# Altium PCB SmartCantonDevBox.PcbDoc (part 1 of 2)
Units mm, origin at the board's own origin, x right, y up, seen from the top; angles counter-clockwise.
Board outline 68 x 80 mm, 4 copper layers (Component Side, Ground Plane, Power Plane, Solder Side), stack 1.569 mm thick; 161 components, 90 nets, 543 pads, 213 vias.
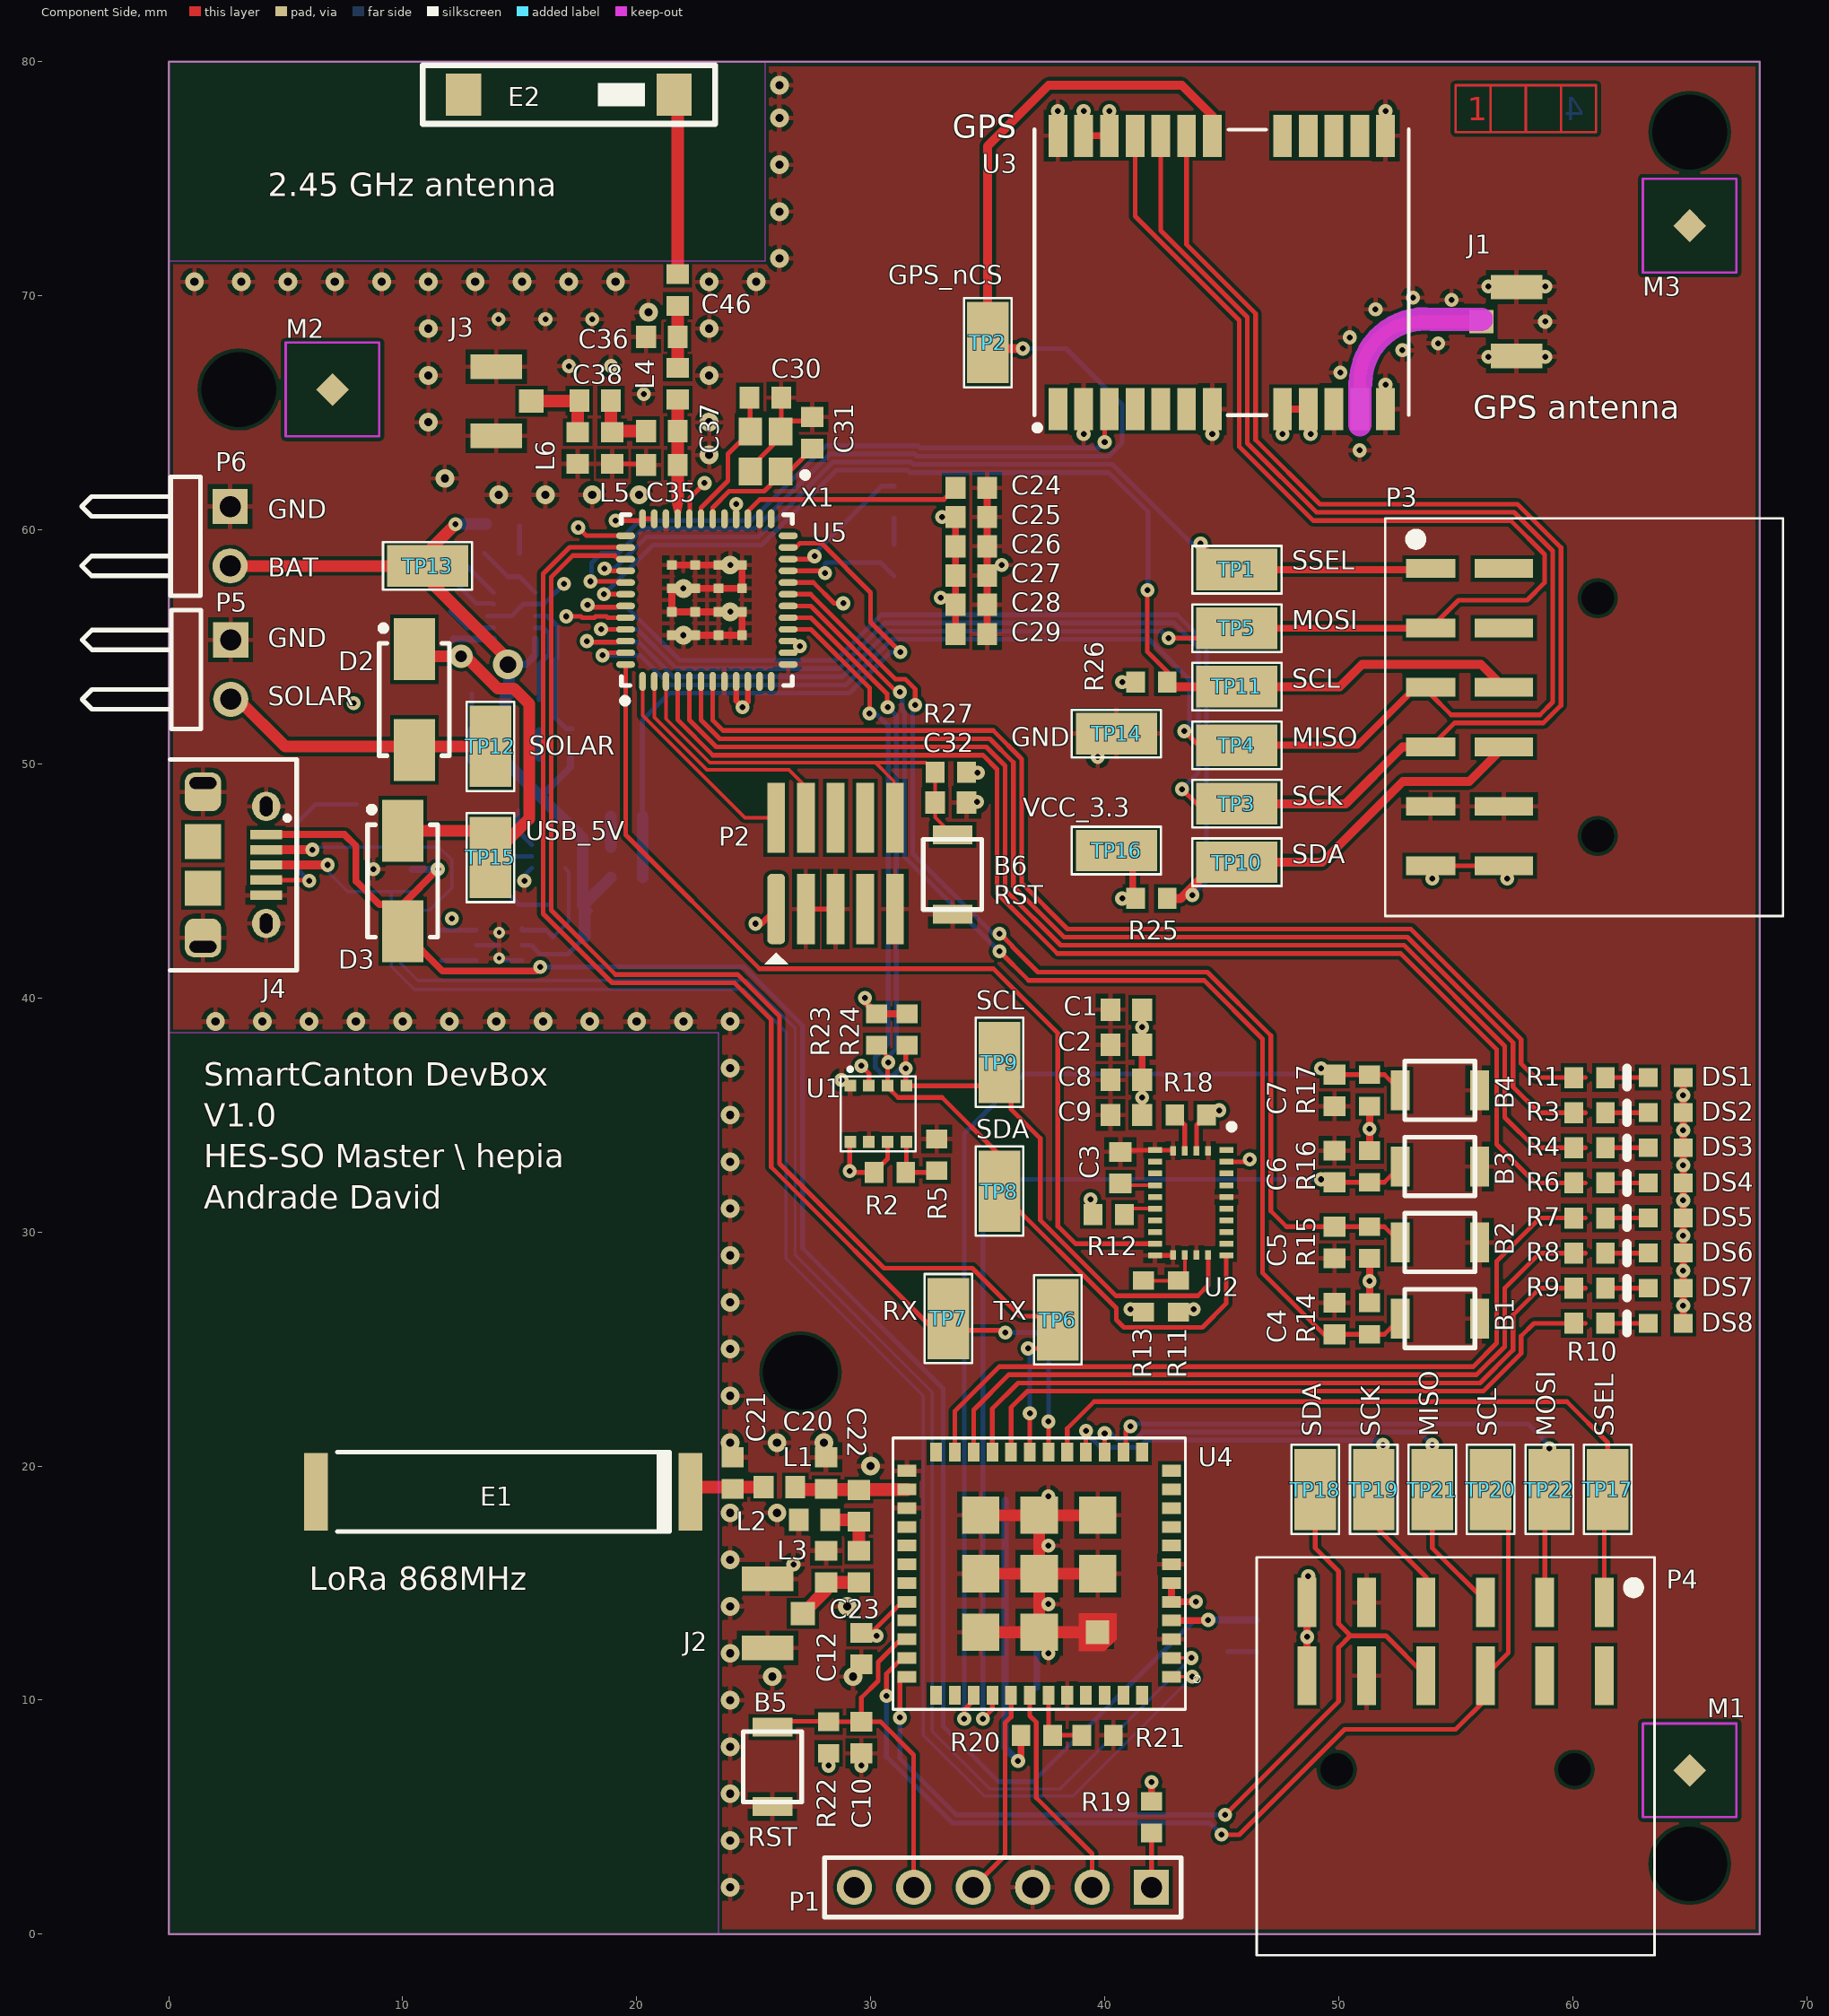
[diagram p0: Component Side view]
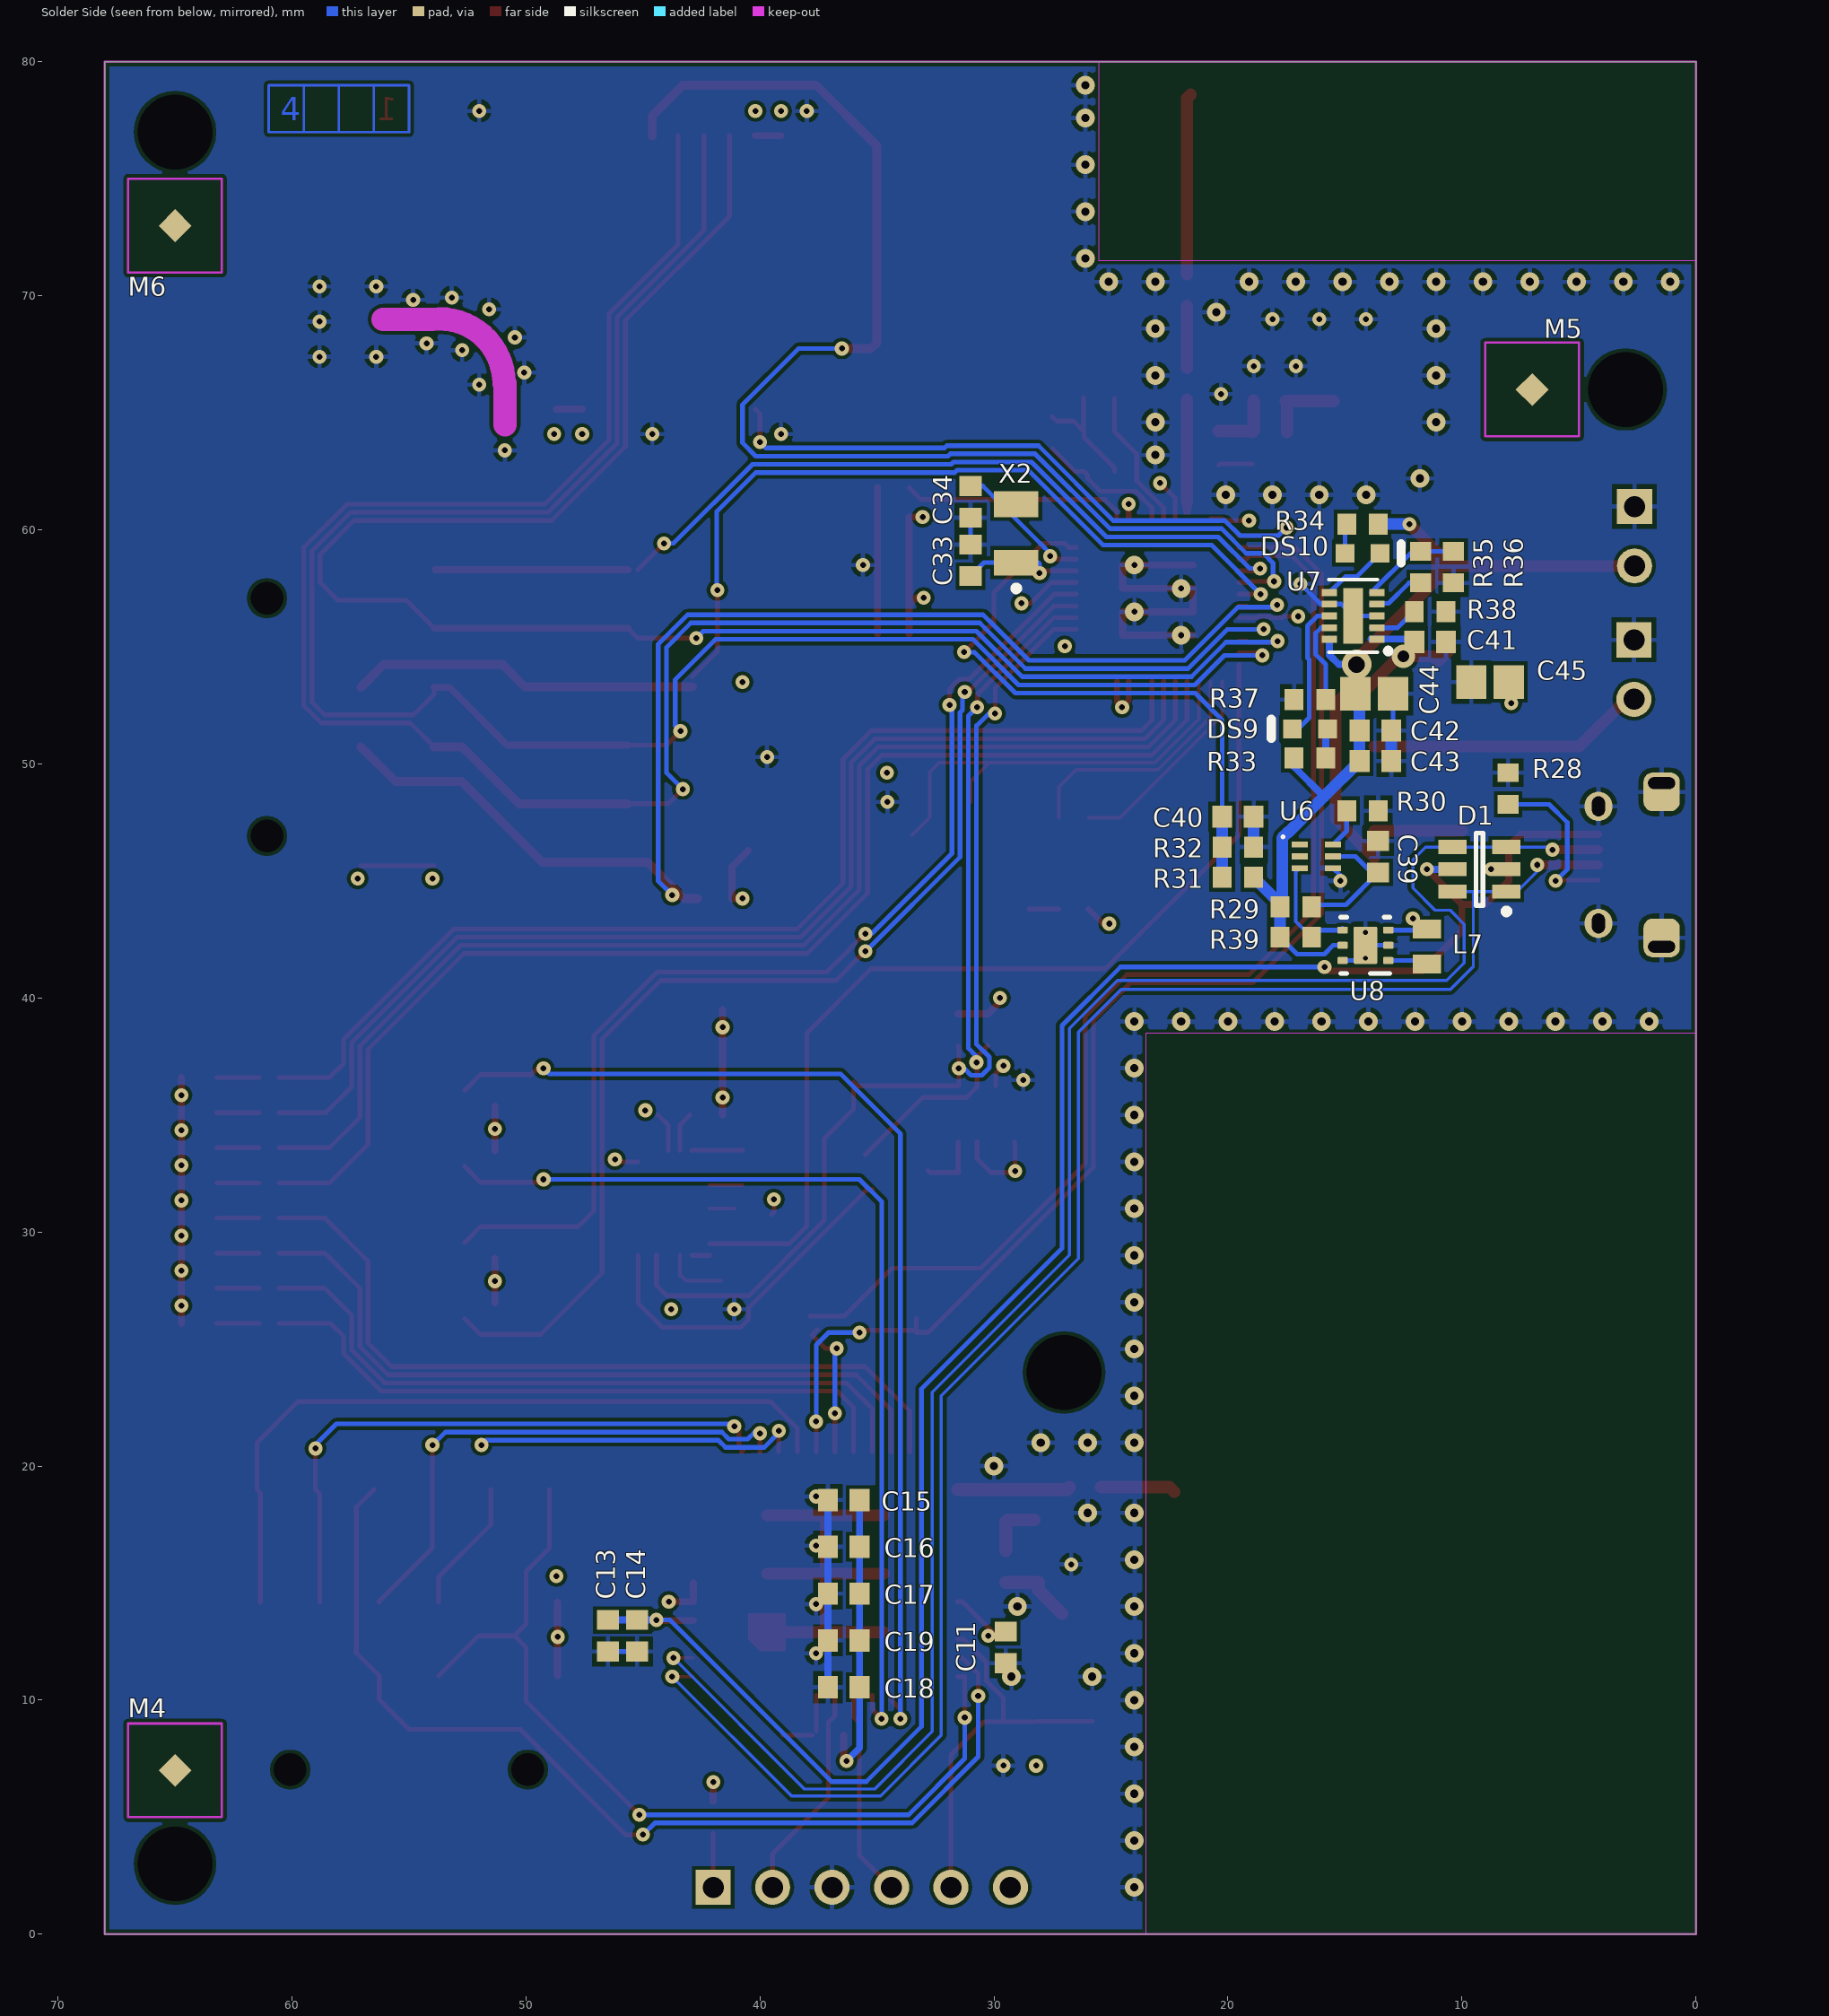
[diagram p1: Solder Side view, seen from below]
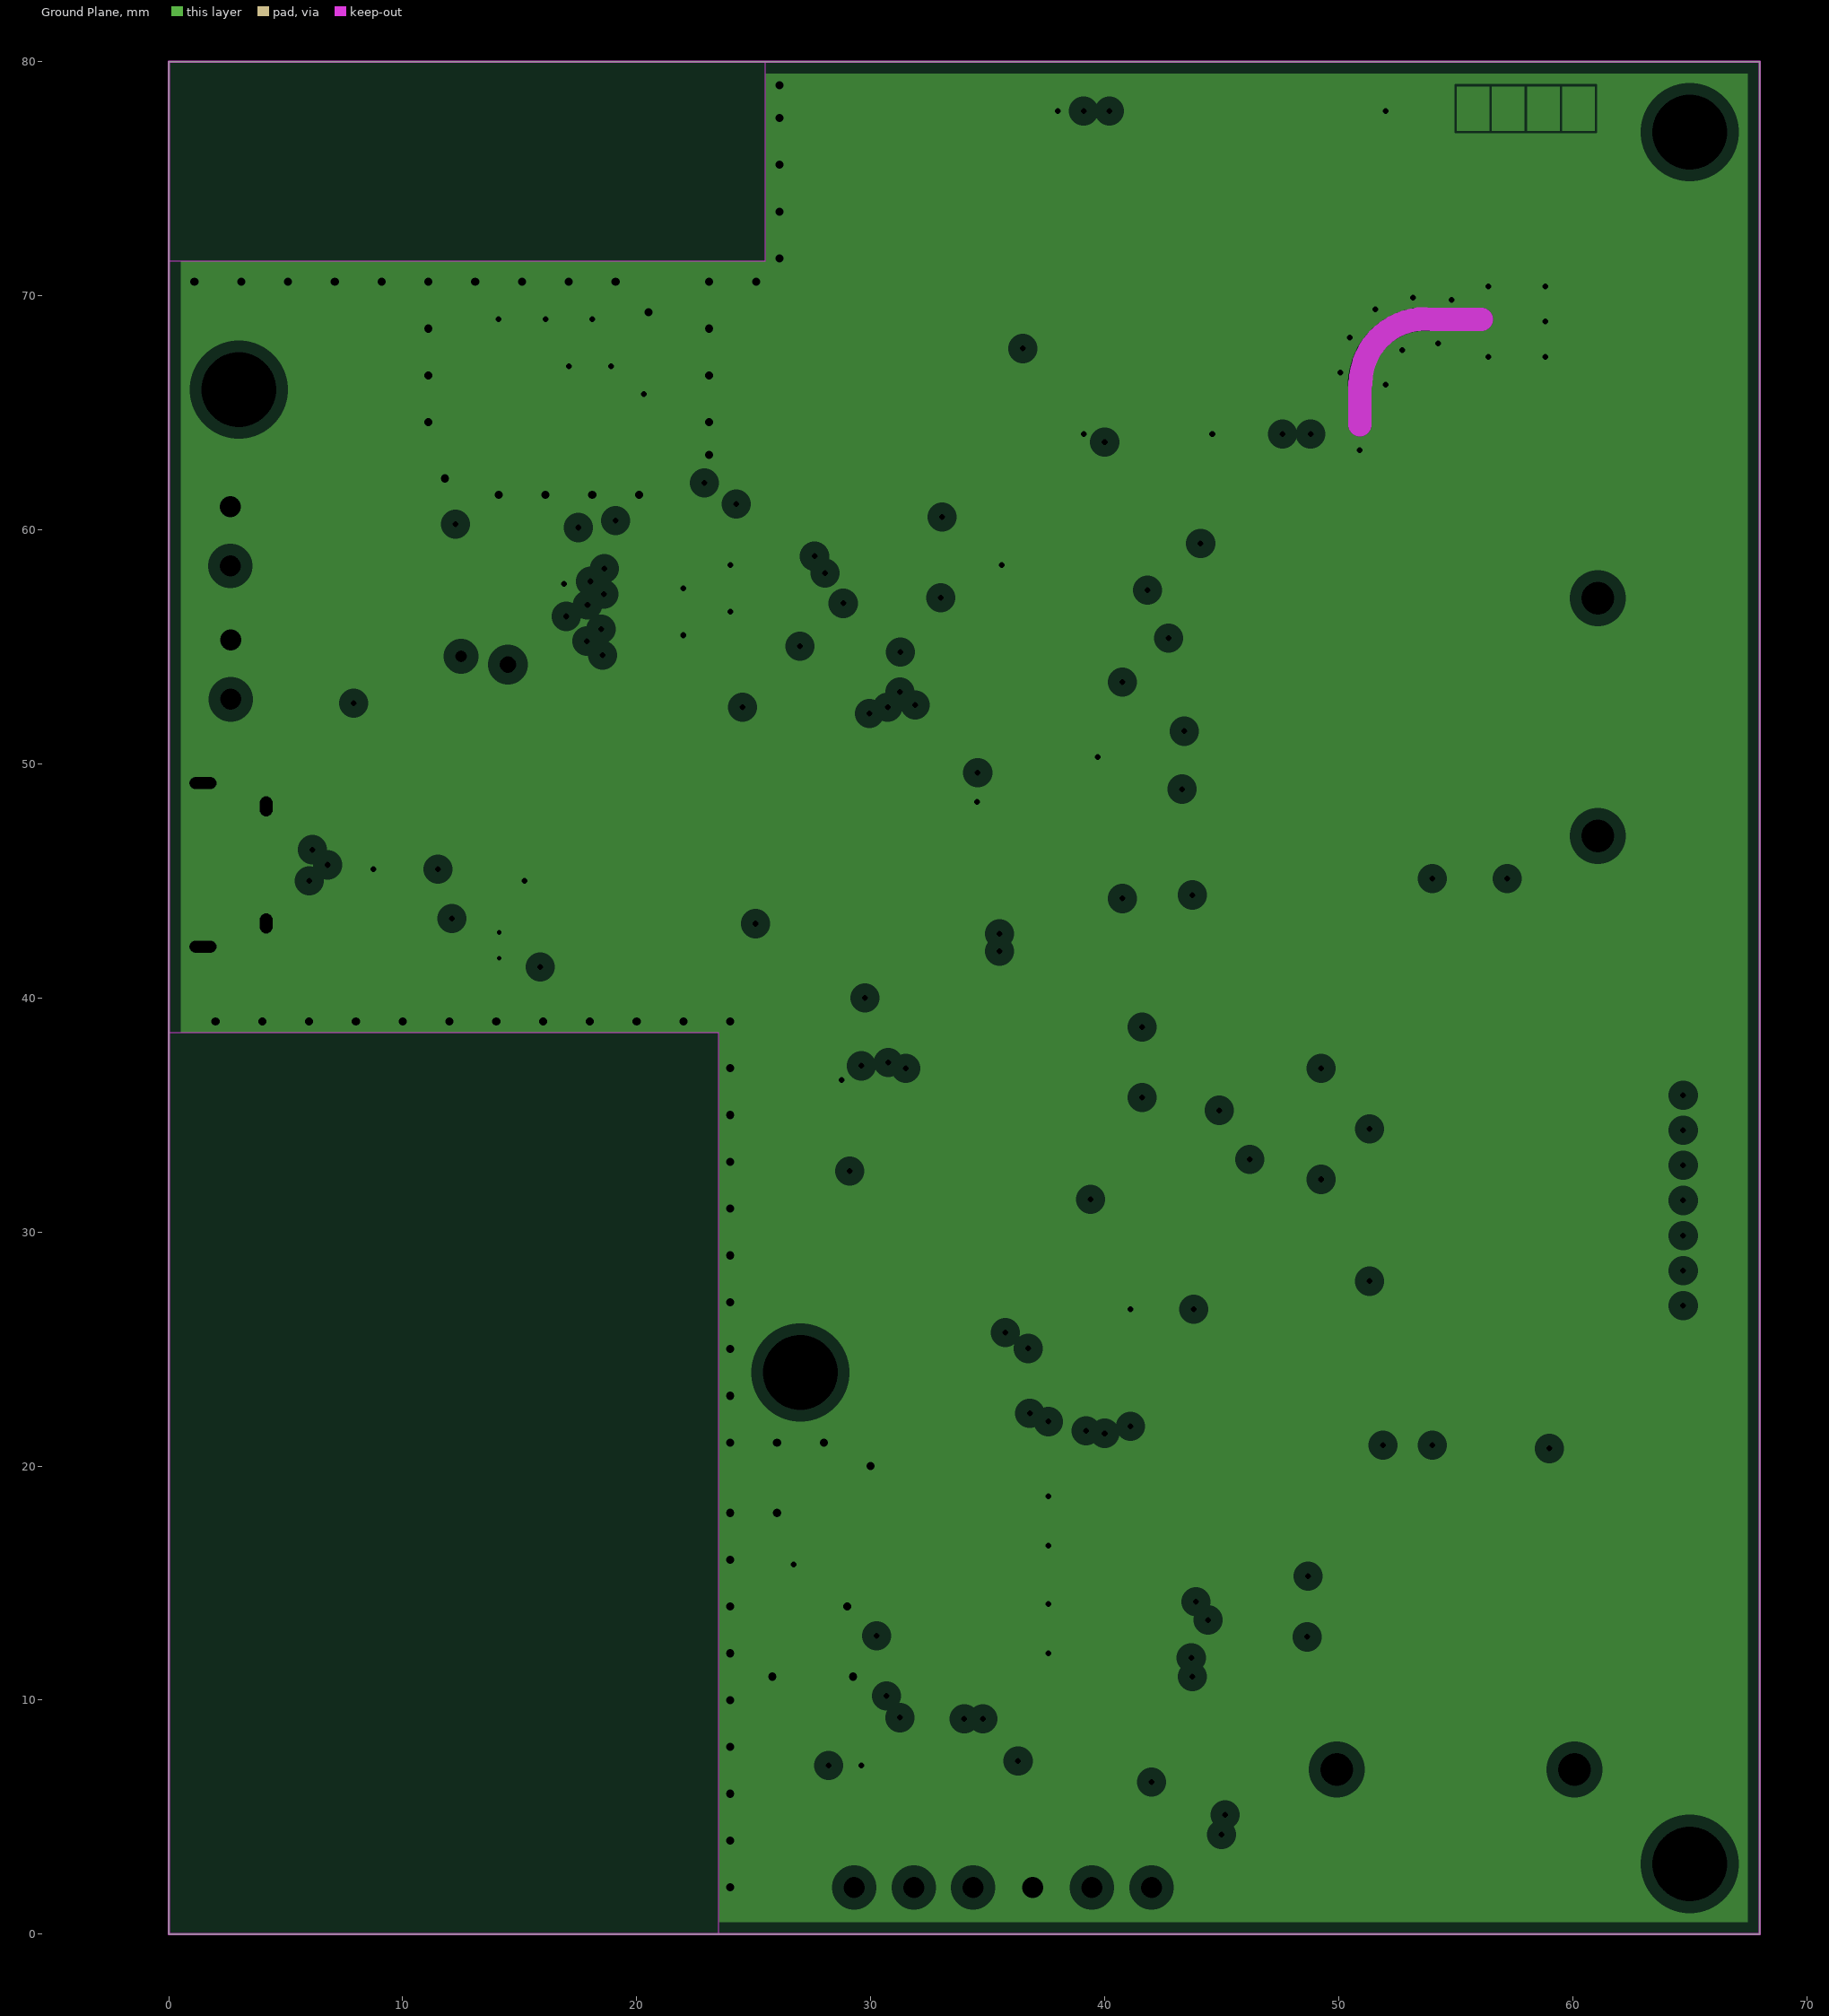
[diagram p2: Ground Plane, clearances drawn from the general rule]
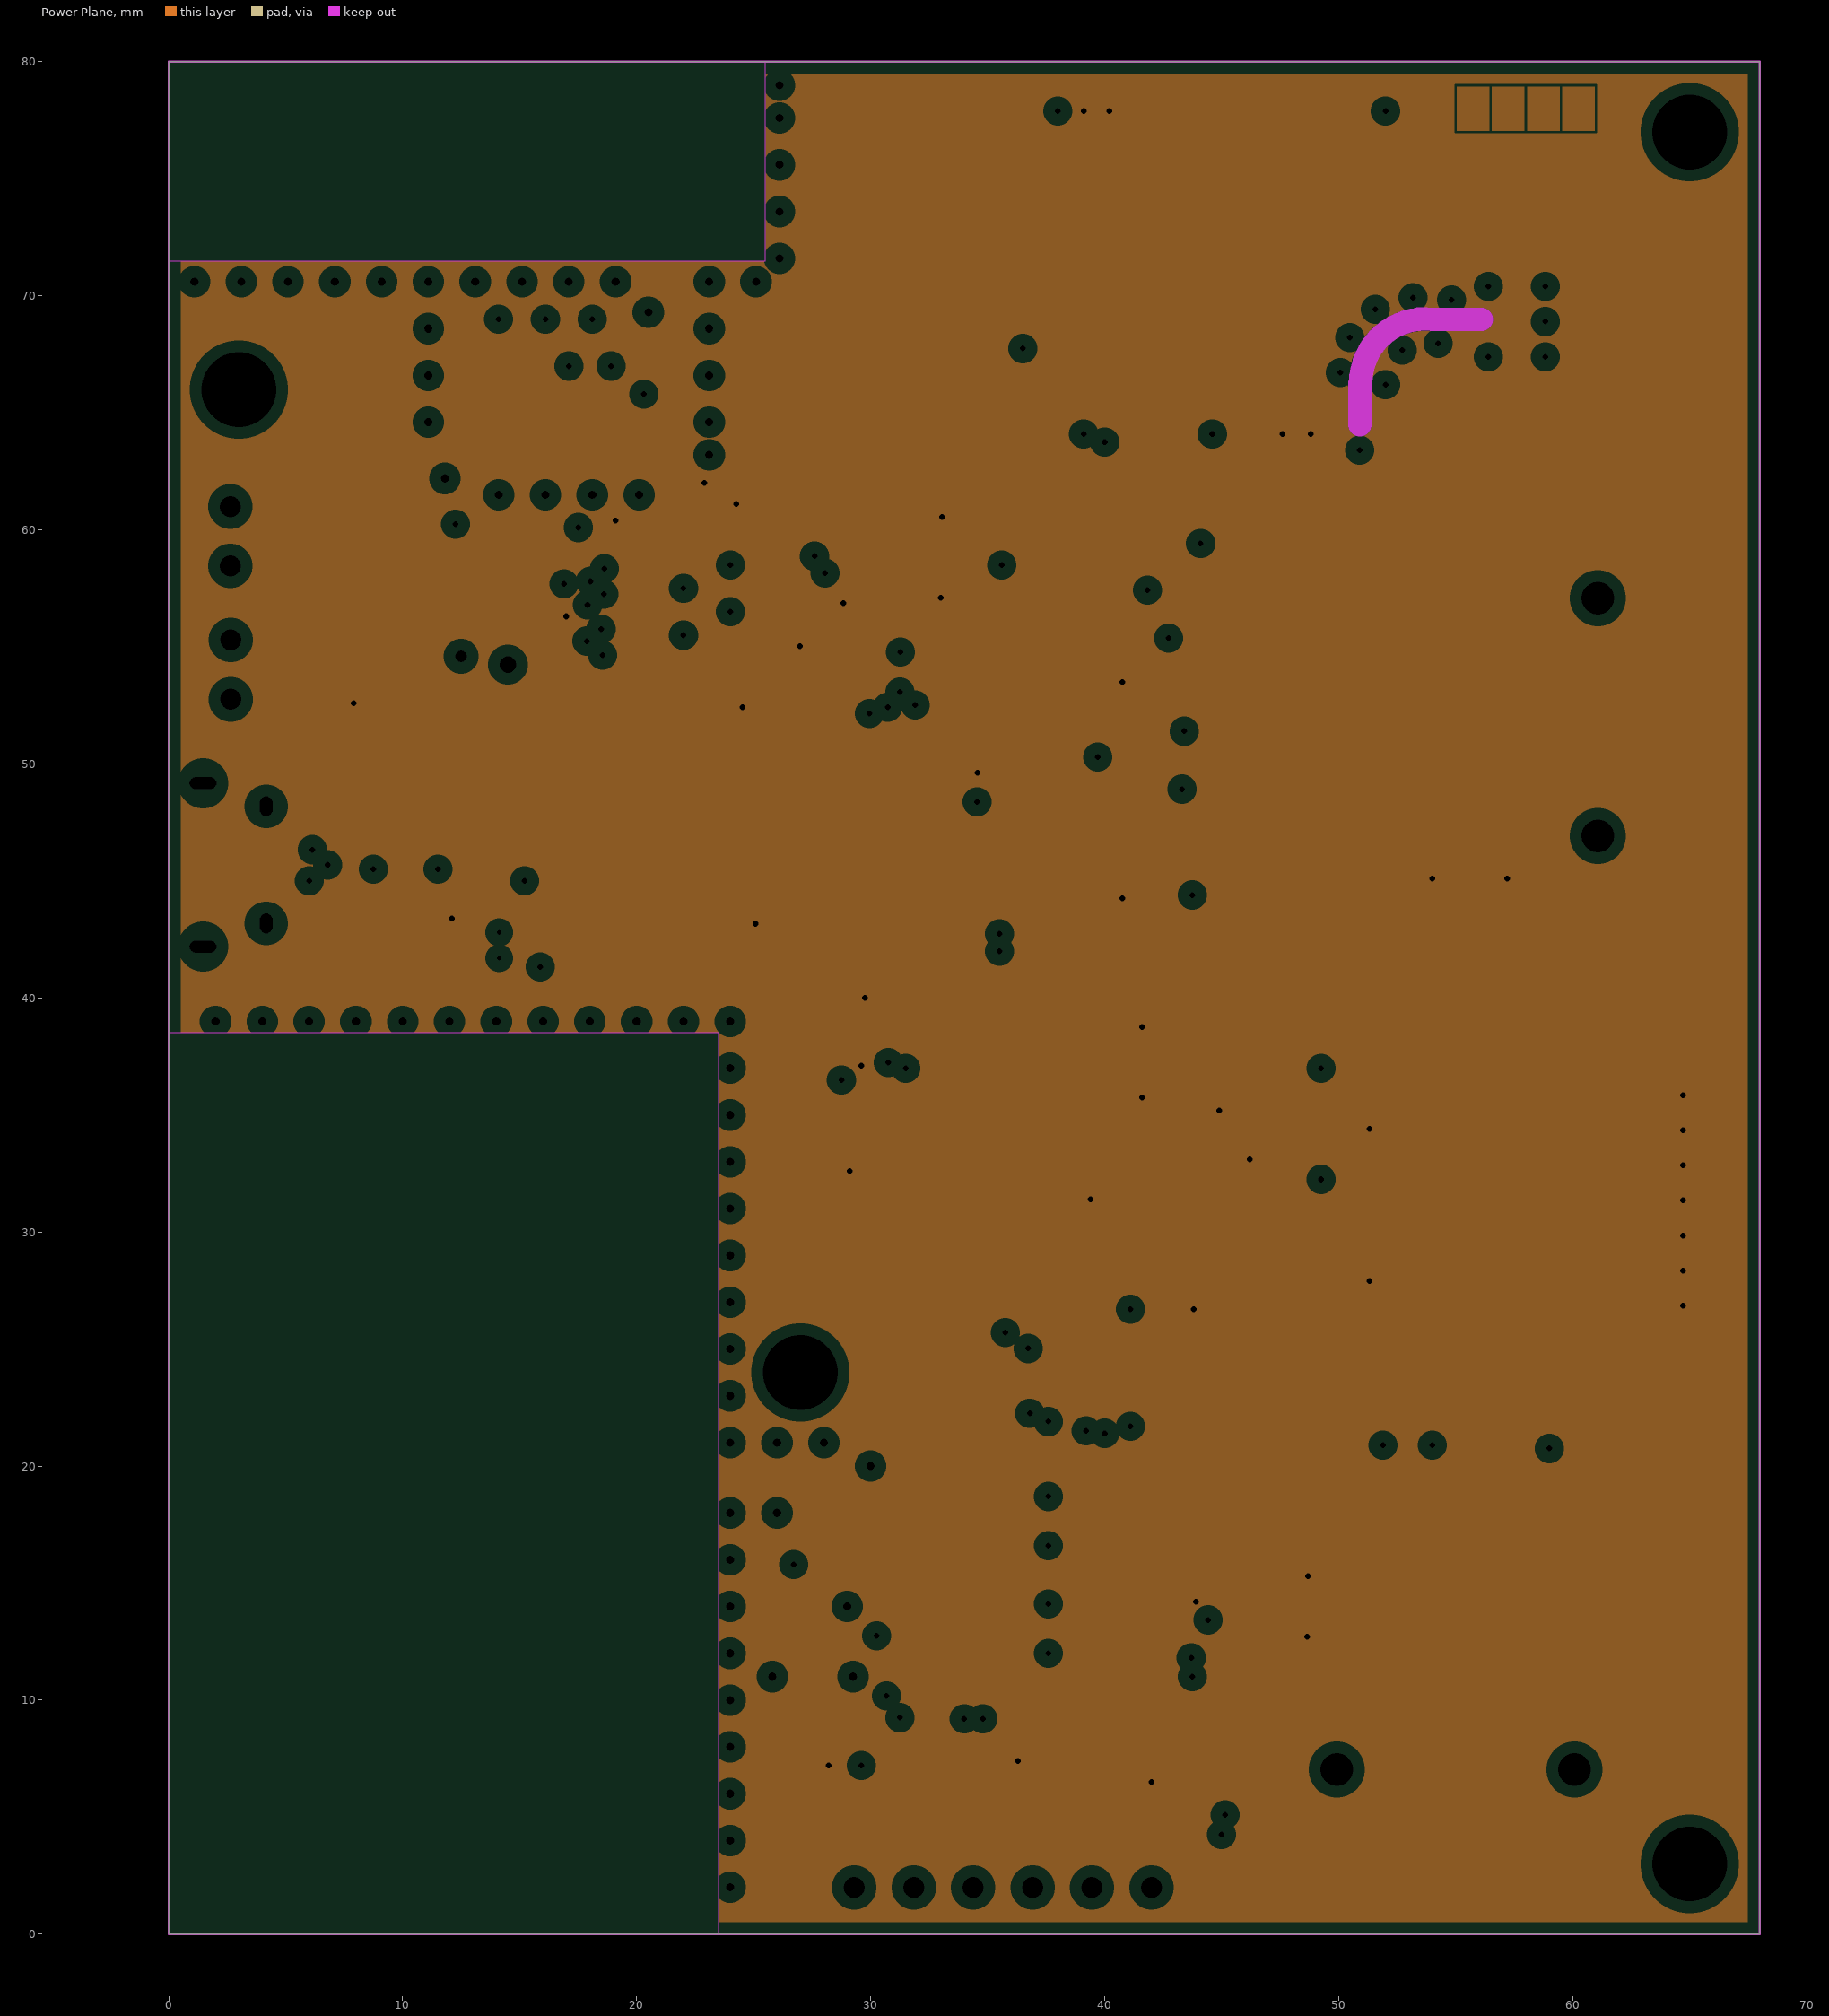
[diagram p3: Power Plane, clearances drawn from the general rule]
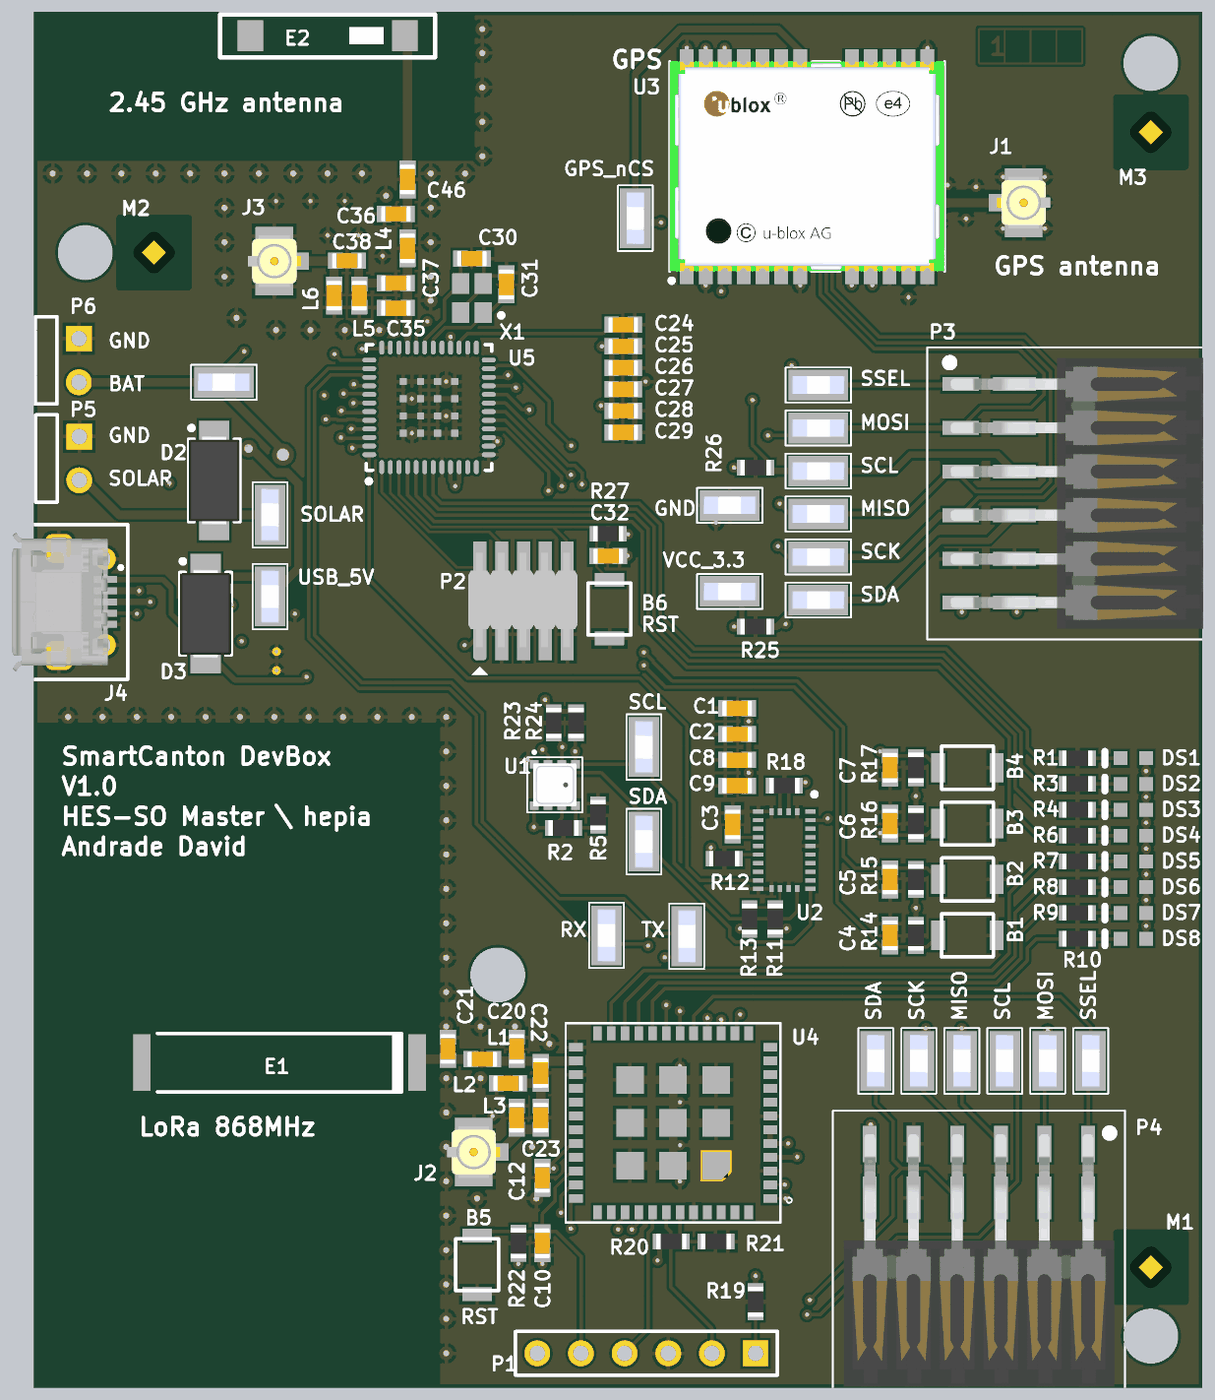
[diagram p5: 3D render of the assembled board from above, using the file's embedded part models]
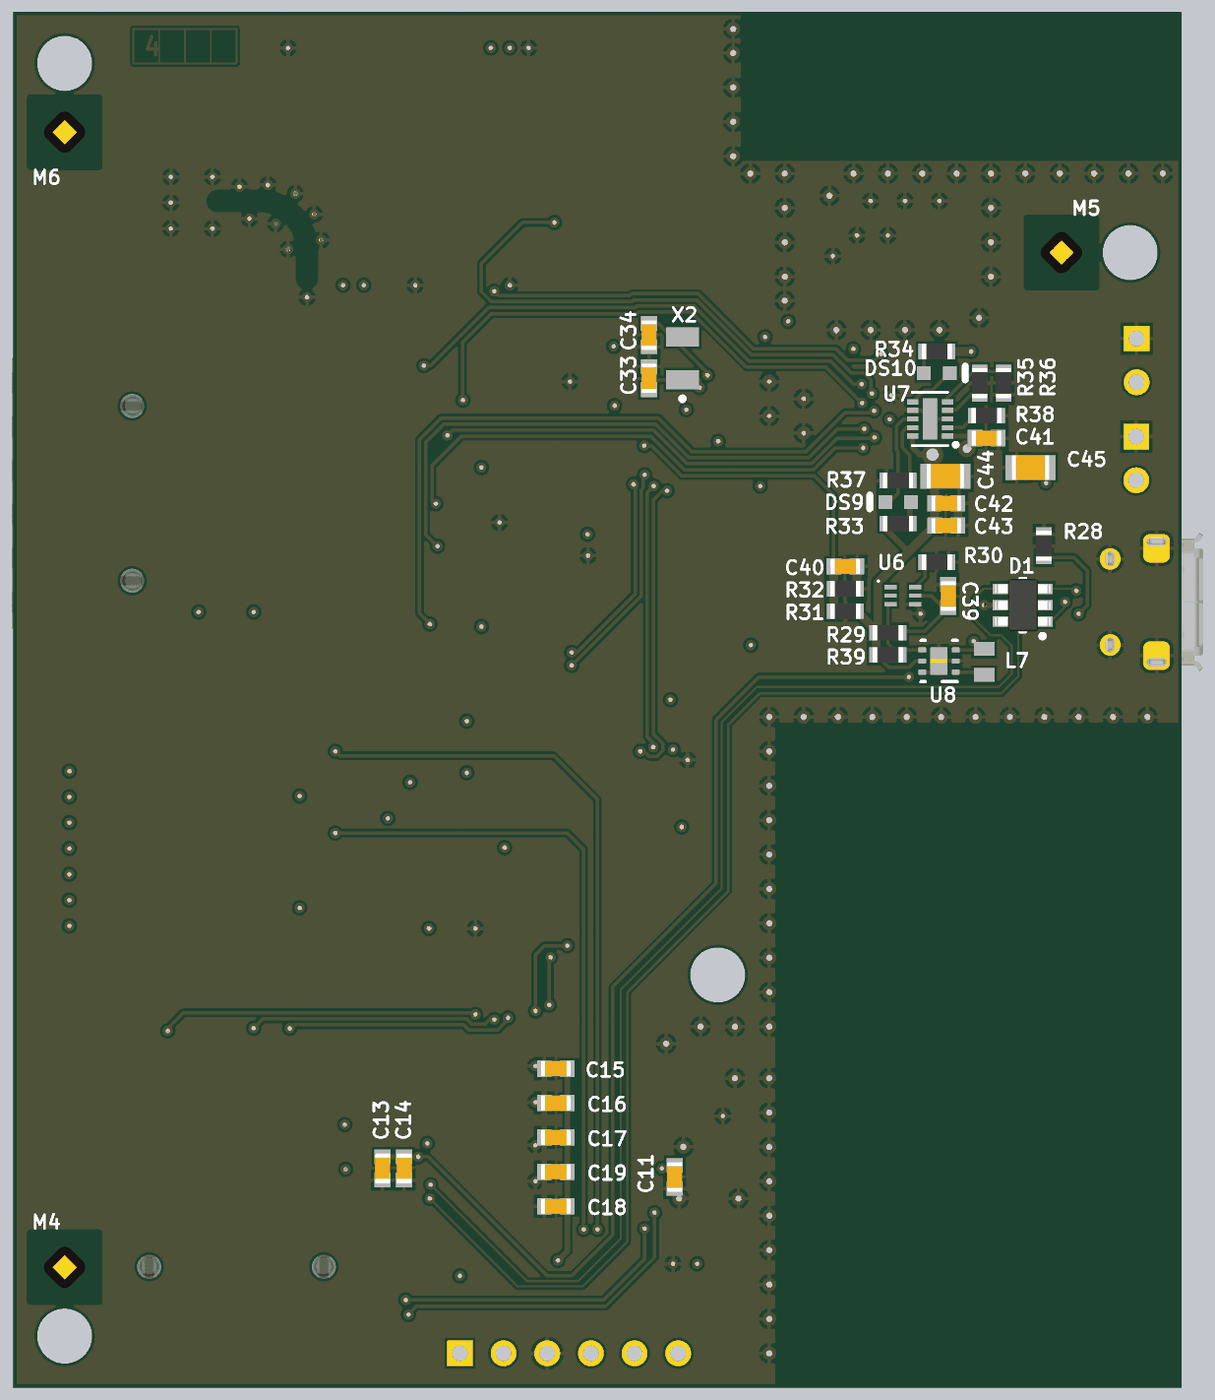
[diagram p6: 3D render of the assembled board from below, using the file's embedded part models]

## Layer stack, top to bottom
Top Solder: solder mask 0.0102, Solder Resist, Dk 3.5
Component Side: signal copper 0.0348
Dielectric 1: core 0.36, FR-4, Dk 4.2
Ground Plane: plane copper 0.0348, net GND
Dielectric 3: prepreg 0.71, FR-4, Dk 4.2
Power Plane: plane copper 0.0348, net VCC_3.3
Dielectric 4: core 0.36, FR-4, Dk 4.2
Solder Side: signal copper 0.0348
Bottom Solder: solder mask 0.0102, Solder Resist, Dk 3.5

## Board outline
0,0 68,0 68,80 0,80

## Design rules (kind name [scope] priority, off if disabled: settings)
Clearance "Schematic Clearance Constraint" [InNet('RF_IN')] p1: gap=0.157 ignorepadtopadclearanceinfootprint=FALSE except(0: Arc-Hole Track-Hole SMDPad-Hole THPad-Hole Via-Hole Fill-Hole Poly-Hole Region-Hole Text-Hole)
Clearance [All] p2: gap=0.15 ignorepadtopadclearanceinfootprint=FALSE
ComponentClearance [All] p1: gap=0.2 collisioncheckmode=3 verticalgap=0.2 showdistances=FALSE
DiffPairsRouting [All] p1: maxlimit=0.254 minlimit=0.254 mostfreqgap=0.254 toplayer_minwidth=0.1 toplayer_maxwidth=0.5 toplayer_prefwidth=0.2 bottomlayer_minwidth=0.1 bottomlayer_maxwidth=0.5 bottomlayer_prefwidth=0.2 maxuncoupledlength=12.7
Height [All] p1: minheight=0 maxheight=30 prefheight=12.7
HoleSize [All] p1: absolutevalues=TRUE maxlimit=10 minlimit=0.025 maxpercent=80.000 minpercent=20.000
MaxMinImpedance "Schematic Impedance Constraint_11" [InNetClass('USB_90R')] p1: minimum=90.00 maximum=90.00
MaxMinImpedance "Schematic Impedance Constraint_9" [InNet('NetC23_2')] p2: minimum=49.50 maximum=50.50
MaxMinImpedance "Schematic Impedance Constraint_8" [InNet('ANT')] p3: minimum=49.50 maximum=50.50
MaxMinImpedance "Schematic Impedance Constraint_7" [InNet('NetC37_2')] p4: minimum=49.50 maximum=50.50
MaxMinImpedance "Schematic Impedance Constraint_6" [InNet('ANT_MKW41Z')] p5: minimum=49.50 maximum=50.50
MaxMinImpedance "Schematic Impedance Constraint_5" [InNet('NetC36_2')] p6: minimum=49.50 maximum=50.50
MaxMinImpedance "Schematic Impedance Constraint_4" [InNet('NetC21_2')] p7: minimum=49.50 maximum=50.50
MaxMinImpedance "Schematic Impedance Constraint_3" [InNet('NetC22_2')] p8: minimum=49.50 maximum=50.50
MaxMinImpedance "Schematic Impedance Constraint_2" [InNet('NetC38_2')] p9: minimum=49.50 maximum=50.50
MaxMinImpedance "Schematic Impedance Constraint_1" [InNet('ANT_MKW41Z')] p10: minimum=49.50 maximum=50.50
MaxMinImpedance "Schematic Impedance Constraint" [InNet('ANT')] p11: minimum=49.50 maximum=50.50
MaxMinImpedance "Schematic Impedance Constraint_10" [InNet('ANT')] p12: minimum=49.50 maximum=50.50
MaxMinImpedance ANT_50R [InNetClass('50R')] p13: minimum=49.00 maximum=51.00
MaxMinImpedance USB_90R [InNetClass('USB_90R')] p14: minimum=89.50 maximum=90.50
MinimumSolderMaskSliver [All] p1: minsoldermaskwidth=0.2
PlaneClearance [All] p1: clearance=0.5
PlaneClearance PlaneClearance_fiducial [(InComponent('M1') OR InComponent('M2') OR InComponent('M3'))] p2: clearance=2
PlaneConnect [All] p1: planeconnectstyle=Relief reliefexpansion=0.5 reliefentries=4 reliefconductorwidth=0.2 reliefairgap=0.2
PolygonConnect [All] p1: connectstyle=Relief reliefconductorwidth=0.2 reliefentries=4 polygonreliefangle="90 Angle" airgapwidth=0.2
RoutingCorners [All] p1: cornerstyle=45-Degree minsetback=2 maxsetback=3
RoutingVias [All] p1: holewidth=0.25 width=0.6 viastyle="Through Hole" minholewidth=0.2 minwidth=0.5 maxholewidth=2 maxwidth=1.5
SilkToSilkClearance [All] p1: silktosilkclearance=0.2
SilkToSolderMaskClearance [IsPad] p1: minsilkscreentomaskgap=0.1 clearancetoexposedcopper=TRUE
SolderMaskExpansion [All] p1: expansion=0
Width Width_90R [InNetClass('USB_90R')] p1: maxlimit=0.138 minlimit=0.127 preferedwidth=0.132 impedancedriven=TRUE minimp=89.000000 maximp=91.000000 favimp=90.000000
Width Width_50R [InNetClass('50R')] p2: maxlimit=0.566 minlimit=0.53 preferedwidth=0.548 impedancedriven=TRUE minimp=49.000000 maximp=51.000000 favimp=50.000000
Width [All] p3: maxlimit=2 minlimit=0.1 preferedwidth=0.2
20 further rules are at their usual default settings.

## Classes and differential pairs
net class USR_LED[0..7]: USR_LED0 USR_LED1 USR_LED2 USR_LED3 USR_LED4 USR_LED5 USR_LED6 USR_LED7
component class PowerSupply: C39 C40 C41 C42 C43 C44 C45 D1 D2 D3 D? DS9 DS10 J4 L7 P5 P6 R28 R29 R30 R31 R32 R33 R34 R35 R36 R37 R38 R39 TP12 TP13 TP14 TP15 TP16 U6 U7 U8
component class EmbeddedPeripherals: B1 B2 B3 B4 B? C1 C2 C3 C4 C5 C6 C7 C8 C9 DS1 DS2 DS3 DS4 DS5 DS6 DS7 DS8 DS? R1 R2 R3 R4 R5 R6 R7 R8 R9 R10 R11 R12 R13 R14 R15 R16 R17 R18 R? U1 U2
net class 50R: ANT ANT_MKW41Z NetC21_2 NetC22_2 NetC23_2 NetC36_2 NetC37_2 NetC38_2 NetC46_2 RF_IN
component class LoRa: B5 C10 C11 C12 C13 C14 C15 C16 C17 C18 C19 P1 R19 R20 R21 R22 TP17 TP18 TP19 TP20 TP21 TP22 U4
component class LoRaAntenna: C20 C21 C22 C23 E1 J2 L1 L2 L3 L?
component class GPS: J1 U3
component class MCUAntenna: C35 C36 C37 C38 C46 E2 J3 L4 L5 L6 L?
component class Microcontroller: B6 C24 C25 C26 C27 C28 C29 C30 C31 C32 C33 C34 P2 R23 R24 R25 R26 R27 TP1 TP2 TP3 TP4 TP5 TP6 TP7 TP8 TP9 TP10 TP11 TP? U5 X1 X2 X?
net class USR_BTN[0..3]: USR_BTN0 USR_BTN1 USR_BTN2 USR_BTN3
component class "PMOD connectors": P3 P4
component class SmartCantonDevBox_TopPage: M1 M2 M3 M4 M5 M6 M?
net class USB_90R: USB_D_N USB_D_P
differential pair USB_D: +USB_D_P -USB_D_N

## Components (designator, comment, footprint, x,y, rotation, side; value= is the part's Value field where it differs from the comment)
B1 "653-B3U-1000P" B3U-1000P 54.325,26.3 r0 top
B2 "653-B3U-1000P" B3U-1000P 54.325,29.55 r0 top
B3 "653-B3U-1000P" B3U-1000P 54.325,32.8 r0 top
B4 "653-B3U-1000P" B3U-1000P 54.325,36.05 r0 top
B5 "653-B3U-1000P" B3U-1000P 25.8,7.15 r270 top
B6 "653-B3U-1000P" B3U-1000P 33.5,45.275 r270 top
C1 "1u" CAPC1608X08 40.925,39.5 r0 top
C2 "100n" CAPC1608X08 40.925,38 r0 top
C3 "100n" CAPC1608X08 40.675,32.75 r90 top
C4 "100n" CAPC1608X08 49.825,26.3 r90 top
C5 "100n" CAPC1608X08 49.825,29.55 r270 top
C6 "100n" CAPC1608X08 49.825,32.8 r90 top
C7 "100n" CAPC1608X08 49.825,36.05 r270 top
C8 "120n" CAPC1608X08 40.925,36.5 r0 top
C9 "6.8n" CAPC1608X08 40.925,35 r0 top
C10 "100n" CAPC1608X08 29.6,8.4 r90 top
C11 "1u" CAPC1608X08N 29.5,12.25 r90 bottom
C12 "100n" CAPC1608X08N 29.6,12.2 r90 top
C13 "10u" CAPC1608X08N 46.5,12.75 r90 bottom
C14 "100n" CAPC1608X08N 45.25,12.75 r90 bottom
C15 "100n" CAPC1608X08N 36.42,18.55 r180 bottom
C16 "10u" CAPC1608X08N 36.42,16.55 r180 bottom
C17 "10u" CAPC1608X08N 36.42,14.55 r180 bottom
C18 "1u" CAPC1608X08N 36.42,10.55 r180 bottom
C19 "100n" CAPC1608X08N 36.42,12.55 r180 bottom
C20 "NC" CAPC1608X08 28.1,19.7 r270 top
C21 "NC" CAPC1608X08 24.1,19.7 r270 top
C22 "NC" CAPC1608X08 29.5,18.3 r270 top
C23 "NC" CAPC1608X08 29.5,15.7 r270 top
C24 "8p" CAPC1608X08 34.3,61.8 r180 top
C25 "10u" CAPC1608X08N 34.3,60.55 r180 top
C26 "1u" CAPC1608X08N 34.3,59.3 r180 top
C27 "100n" CAPC1608X08N 34.3,58.05 r180 top
C28 "100n" CAPC1608X08N 34.3,56.8 r180 top
C29 "10u" CAPC1608X08N 34.3,55.55 r180 top
C30 "8p" CAPC1608X08 25.5,65.65 r180 top
C31 "8p" CAPC1608X08 27.5,64.15 r270 top
C32 "100n" CAPC1608X08 33.425,48.35 r180 top
C33 "12.5p" CAPC1608X08 31,58.7 r270 bottom
C34 "12.5p" CAPC1608X08 31,61.2 r90 bottom
C35 "0.7p" CAPC1608X08 21.075,62.775 r0 top
C36 "NC" CAPC1608X08 21.075,68.25 r0 top
C37 "NC" CAPC1608X08 21.075,64.225 r180 top
C38 "NC" CAPC1608X08 18.225,65.525 r180 top
C39 "100n" CAPC1608X08 13.584,46.036 r270 bottom
C40 "1u" CAPC1608X08 19.575,47.75 r0 bottom
C41 "1u" CAPC1608X08 11.359,55.211 r0 bottom
C42 "1u" CAPC1608X08 13.7,51.425 r0 bottom
C43 "1u" CAPC1608X08 13.7,50.125 r0 bottom
C44 "10u" CAPC2012X14 13.75,53 r180 bottom
C45 "10u" CAPC2012X14 8.8,53.5 r0 bottom
C46 "10p" CAPC1608X08 21.75,70.25 r90 top
D1 "USBLC6-2SC6" STM-SOT23-6L_V 9.25,45.5 r0 bottom
D2 "S1A" DO-214AC 10.5,52.75 r90 top
D3 "S1A" DO-214AC 10,45 r90 top
DS1 "LTST-C190KRKT" LTST-C191KRKT_V 63.975,36.6 r180 top
DS2 "LTST-C190KGKT" LITE-ON-LTST-C190GKT-2_V 63.975,35.1 r180 top
DS3 "LTST-C190TBKT" LTST-C190TBKT-2_V 63.975,33.6 r180 top
DS4 "LTST-C190KSKT" LTST-C190KSKT_V 63.975,32.1 r180 top
DS5 "LTST-C190KRKT" LTST-C191KRKT_V 63.975,30.6 r180 top
DS6 "LTST-C190KGKT" LITE-ON-LTST-C190GKT-2_V 63.975,29.1 r180 top
DS7 "LTST-C190TBKT" LTST-C190TBKT-2_V 63.975,27.6 r180 top
DS8 "LTST-C190KSKT" LTST-C190KSKT_V 63.975,26.1 r180 top
DS9 "LTST-C190KGKT" LITE-ON-LTST-C190GKT-2_V 16.5,51.5 r0 bottom
DS10 "LTST-C190KGKT" LITE-ON-LTST-C190GKT-2_V 14.25,59 r180 bottom
E1 "ANT-868-CHP-T" ANT-868-916-CHP 14.3,18.9 r180 top
E2 "2450AT45A100E" "Antenne 2.4ghz Ceramique" 17.1,78.6 r180 top
J1 "U.FL-R-SMT-1" U.FL-R-SMT-1 57.6,68.9 r270 top
J2 "U.FL-R-SMT-1" U.FL-R-SMT-1 25.6,13.7 r90 top
J3 "U.FL-R-SMT-1" U.FL-R-SMT-1 14,65.5 r90 top
J4 "10118194" 10118194-0001LF 1.466,45.686 r270 top
L1 "0" INDC1608X08 26.1,19.1 r180 top
L2 "NC" INDC1608X08 27.6,17.7 r0 top
L3 "NC" INDC1608X08 28.1,15.7 r270 top
L4 "5.1n" INDC1608X08 21.75,66.25 r90 top
L5 "NC" INDC1608X08 18.95,63.5 r90 top
L6 "NC" INDC1608X08 17.475,63.5 r90 top
L7 "2.2 u" TDK-IND0805-125_V 11.5,42.2 r90 bottom
M1 "1mm" Losange-1mm 65,7 r0 top
M2 "1mm" Losange-1mm 7,66 r0 top
M3 "1mm" Losange-1mm 65,73 r0 top
M4 "1mm" Losange-1mm 65,7 r180 bottom
M5 "1mm" Losange-1mm 7,66 r180 bottom
M6 "1mm" Losange-1mm 65,73 r180 bottom
P1 "Header 6" HDR1X6 42,2 r180 top
P2 "20021121-00010C4LF" PCBComponent 28.5,45.75 r90 top
P3 "PMOD 6x2" "PMOD SMD Header 6x2" 57.5,52 r270 top
P4 "PMOD 6x2" "PMOD SMD Header 6x2" 55,10.6 r180 top
P5 "Header 2H" HDR1X2H 2.65,55.3 r270 top
P6 "Header 2H" HDR1X2H 2.625,61 r270 top
R1 "150" RESC1608X06 60.725,36.6 r0 top
R2 "NC" RESC1608X06 30.825,32.55 r180 top
R3 "150" RESC1608X06 60.725,35.1 r0 top
R4 "15" RESC1608X06 60.725,33.6 r0 top
R5 "0" RESC1608X06 32.825,33.3 r270 top
R6 "150" RESC1608X06 60.725,32.1 r0 top
R7 "150" RESC1608X06 60.725,30.6 r0 top
R8 "150" RESC1608X06 60.725,29.1 r0 top
R9 "15" RESC1608X06 60.725,27.6 r0 top
R10 "150" RESC1608X06 60.725,26.1 r0 top
R11 "NC" RESC1608X06 43.15,27.25 r270 top
R12 "10k" RESC1608X06 40.175,30.75 r0 top
R13 "0" RESC1608X06 41.65,27.25 r90 top
R14 "10k" RESC1608X06 51.325,26.3 r90 top
R15 "10k" RESC1608X06 51.325,29.55 r270 top
R16 "10k" RESC1608X06 51.325,32.8 r90 top
R17 "10k" RESC1608X06 51.325,36.05 r270 top
R18 "10k" RESC1608X06 43.675,35 r180 top
R19 "NC" RESC1608X06 42,5 r270 top
R20 "NC" RESC1608X06 37.1,8.5 r180 top
R21 "100k" RESC1608X06 39.7,8.5 r0 top
R22 "10k" RESC1608X06 28.2,8.4 r90 top
R23 "10k" RESC1608X06 30.25,38.65 r90 top
R24 "10k" RESC1608X06 31.55,38.65 r90 top
R25 "10k" RESC1608X06 42,44.25 r180 top
R26 "10k" RESC1608X06 42,53.5 r180 top
R27 "10k" RESC1608X06 33.425,49.65 r180 top
R28 "100K" RESC1608X06 8.025,48.95 r90 bottom value=100k
R29 "330" RESC1608X06 17.1,43.9 r0 bottom
R30 "2k" RESC1608X06 14.25,48 r0 bottom
R31 "10M" RESC1608X06 19.575,45.15 r180 bottom
R32 "10M" RESC1608X06 19.575,46.45 r0 bottom
R33 "2k" RESC1608X06 16.5,50.25 r180 bottom
R34 "2k" RESC1608X06 14.25,60.25 r0 bottom
R35 "780" RESC1608X06 11.759,58.411 r270 bottom
R36 "780" RESC1608X06 10.359,58.411 r90 bottom
R37 "780" RESC1608X06 16.5,52.75 r180 bottom
R38 "780" RESC1608X06 11.359,56.511 r0 bottom
R39 "NC" RESC1608X06 17.1,42.6 r0 bottom
TP1 "5015" 5015 45.65,58.3 r180 top
TP2 "5015" 5015 35,68 r90 top
TP3 "5015" 5015 45.65,48.3 r180 top
TP4 "5015" 5015 45.65,50.8 r180 top
TP5 "5015" 5015 45.65,55.8 r180 top
TP6 "5015" 5015 38,26.25 r270 top
TP7 "5015" 5015 33.325,26.3 r90 top
TP8 "5015" 5015 35.5,31.75 r90 top
TP9 "5015" 5015 35.5,37.25 r270 top
TP10 "5015" 5015 45.65,45.8 r180 top
TP11 "5015" 5015 45.65,53.3 r0 top
TP12 "5015" 5015 13.75,50.75 r270 top
TP13 "5015" 5015 11.065,58.46 r0 top
TP14 "5015" 5015 40.5,51.3 r180 top
TP15 "5015" 5015 13.75,46 r90 top
TP16 "5015" 5015 40.5,46.3 r0 top
TP17 "5015" 5015 61.5,19 r90 top
TP18 "5015" 5015 49,19 r90 top
TP19 "5015" 5015 51.5,19 r90 top
TP20 "5015" 5015 56.5,19 r90 top
TP21 "5015" 5015 54,19 r90 top
TP22 "5015" 5015 59,19 r270 top
U1 "BME680" LGA-8-30x30x09 30.325,35.05 r0 top
U2 "BNO055" BOSC-LGA-28_N 43.675,31.25 r270 top
U3 "NEO-M8Q" NEO 45,71 r270 top
U4 "CMWX1ZZABZ-078" CMWX1ZZABZ-078 37.2,15.4 r180 top
U5 "MKW41Z" QFN50P700X700X80_HS-49M 23,57 r90 top
U6 "BQ29700" SON50P150X75-6M 16.225,46.05 r180 bottom
U7 "bq24210" WSON50P200X300X80-11N 14.65,56.325 r0 bottom
U8 "TPS62291DRVT" DRV0006A_V 14.125,42.25 r0 bottom
X1 "CX2520DB32000D0GEJZ1" AVX-CX2520DB32000D0GEJZ1-4_V 25.5,63.35 r180 top
X2 "ABS07-32.768KHz-T" ABRA-ABS07-2_V 29.05,59.85 r90 bottom

## Footprints (in the part's own frame and the unit in brackets; to place one, negate y for a bottom-side part, rotate by r counter-clockwise, add the part's x,y. Pads: shape width x height; smd on the part's side, far side on the other; paste and mask are expansions set on the pad)
5015 [mm] "Circuit Board Hardware - PCB MINI SMT TEST POINT"
  rect 3.47x1.78 smd: 1(0,0)
  silkscreen extent -1.91,-1.02 1.91,1.02, body extent -1.56,-0.51 1.56,0.51, height 1.52
10118194-0001LF [mm] "USB Connectors 5P MICRO USB TYPE B RCPT W/ REAR PEGS"
  rect 0.4x1.35 smd: 1(-1.3,2.7) 2(-0.65,2.7) 3(0,2.7) 4(0.65,2.7) 5(1.3,2.7)
  rrect50% 1.65x1.55 hole 0.5 slot 1.15 at 90 deg copper offset 0.375,0: S(-3.495,0)
  oval 1.25x1.2 hole 0.55 slot 0.85 at 0 deg: S(-2.5,2.7) S(2.5,2.7)
  rrect50% 1.65x1.55 hole 0.5 slot 1.15 at 90 deg copper offset -0.375,0: S(3.495,0)
  rect 1.5x1.55 smd: ""(-1,0) ""(1,0)
  silkscreen extent -4.5,-1.4 4.5,4, body extent -4.02,-2.7 4.02,2.88, height 2.72
ABRA-ABS07-2_V [mm] "Hand Drawn, 2-Leads, Body 3.2x1.5mm, Pitch 2.5mm"
  rect 1.1x1.9 smd: 1(-1.25,0) 2(1.25,0)
  silkscreen extent -2.47,-0.12 -2.23,0.13, body extent -1.6,-0.75 1.6,0.75, height 0.9
ANT-868-916-CHP [mil] "SM Antenna, 2-Lead, Body 16.0x3.0x1.7mm"
  rect 40x130 smd: 1(-315,0) 2(315,0)
  silkscreen extent -280,-67 280,67, body extent -315,-60 315,60, height 70
"Antenne 2.4ghz Ceramique" [mm] "2450AT45A100E"
  rect 1.5x1.8 smd: 1(-4.5,0) 2(4.5,0)
  silkscreen extent -6.25,-1.25 6.25,1.25, body extent -4.8,-1 4.8,1.1, height 1.21
AVX-CX2520DB32000D0GEJZ1-4_V [mm] "Hand Drawn, 4-Leads,Body 2.5x2mm"
  rect 1x1.2 smd: 1(-0.65,0.85) 2(-0.65,-0.85) 3(0.65,-0.85) 4(0.65,0.85)
  silkscreen extent -1.83,0.88 -1.58,1.12, body extent -1,-1.25 1,1.25, height 0.55
B3U-1000P [mm] "B3U-OMRON"
  rect 0.8x1.7 smd: 1(1.7,0) 2(-1.7,0)
  silkscreen extent -1.5,-1.25 1.5,1.25, body extent -1.5,-1.2 1.5,1.2, height 1.6
BOSC-LGA-28_N [mm] "PQFN, 28-Leads, Body 5.20x3.80mm, Pitch 0.50mm, IPC Medium Density"
  rect 0.25x0.6 smd: 1(-2.25,1.525) 6(-2.25,-1.525) 7(-1.75,-1.525) 8(-1.25,-1.525) 9(-0.75,-1.525) 10(-0.25,-1.525) 11(0.25,-1.525) 12(0.75,-1.525) 13(1.25,-1.525) 14(1.75,-1.525) 15(2.25,-1.525) 20(2.25,1.525) 21(1.75,1.525) 22(1.25,1.525) 23(0.75,1.525) 24(0.25,1.525) 25(-0.25,1.525) 26(-0.75,1.525) 27(-1.25,1.525) 28(-1.75,1.525)
  rect 0.4x0.25 smd: 2(-2.225,0.75) 3(-2.225,0.25) 4(-2.225,-0.25) 5(-2.225,-0.75) 16(2.225,-0.75) 17(2.225,-0.25) 18(2.225,0.25) 19(2.225,0.75)
  silkscreen extent -3.37,1.63 -3.13,1.88, body extent -2.6,-1.9 2.6,1.9, height 1.18
CAPC1608X08 [mm] "N, Chip Capacitor, 2-Leads, Body 1.60x0.80mm, IPC Medium Density"
  rect 0.85x0.95 smd: 1(-0.675,0) 2(0.675,0)
  body extent -0.87,-0.45 0.87,0.45, height 0.8
CAPC1608X08N [mm] "Chip Capacitor, 2-Leads, Body 1.60x0.80mm, IPC Medium Density"
  rect 0.85x0.95 smd: 1(-0.675,0) 2(0.675,0)
  body extent -0.87,-0.45 0.87,0.45, height 0.8
CAPC2012X14 [mm] "N, Chip Capacitor, 2-Leads, Body 2.00x1.25mm, IPC Medium Density"
  rect 1.3x1.45 smd: 1(-0.8,0) 2(0.8,0)
  body extent -1.1,-0.73 1.1,0.73, height 1.4
CMWX1ZZABZ-078 [mm]
  rect 0.8x0.5 smd: 1(-5.65,4.4) 2(-5.65,3.6) 3(-5.65,2.8) 4(-5.65,2) 5(-5.65,1.2) 6(-5.65,0.4) 7(-5.65,-0.4) 8(-5.65,-1.2) 9(-5.65,-2) 10(-5.65,-2.8) 11(-5.65,-3.6) 12(-5.65,-4.4) 25(5.65,-4.4) 26(5.65,-3.6) 27(5.65,-2.8) 28(5.65,-2) 29(5.65,-1.2) 30(5.65,-0.4) 31(5.65,0.4) 32(5.65,1.2) 33(5.65,2) 34(5.65,2.8) 35(5.65,3.6) 36(5.65,4.4)
  rect 0.5x0.8 smd: 13(-4.4,-5.2) 14(-3.6,-5.2) 15(-2.8,-5.2) 16(-2,-5.2) 17(-1.2,-5.2) 18(-0.4,-5.2) 19(0.4,-5.2) 20(1.2,-5.2) 21(2,-5.2) 22(2.8,-5.2) 23(3.6,-5.2) 24(4.4,-5.2) 37(4.4,5.2) 38(3.6,5.2) 39(2.8,5.2) 40(2,5.2) 41(1.2,5.2) 42(0.4,5.2) 43(-0.4,5.2) 44(-1.2,5.2) 45(-2,5.2) 46(-2.8,5.2) 47(-3.6,5.2) 48(-4.4,5.2)
  rect 1x1 smd: 49(-2.5,2.5)
  rect 1.6x1.6 smd: 50(0,2.5) 51(2.5,2.5) 52(-2.5,0) 53(0,0) 54(2.5,0) 55(-2.5,-2.5) 56(0,-2.5) 57(2.5,-2.5)
  Component Side region: -1.7,1.7 -1.7,3.3 -2.8,3.3 -3.3,2.8 -3.3,1.7
  Component Side region: -1.225,1.65 -0.975,1.65 0.975,1.65 1.225,1.65
  silkscreen extent -6.9,-5.8 6.25,5.8
DO-214AC [mm] "V Molded Diode, 2-Leads, Body 4.38x2.73mm, Recommended"
  rect 2.65x1.75 smd: A(-2.15,0) K(2.15,0)
  silkscreen extent -2.4,-1.5 3.17,1.5, body extent -2.59,-1.47 2.59,1.48, height 2.7
DRV0006A_V [mm] "SON, 6-Leads, Body 2x2mm, Pitch 0.65mm, Thermal Pad 1.6x1mm, TI Recommended"
  rrect33% 0.45x0.3 smd: 1(-0.975,0.65) 2(-0.975,0) 3(-0.975,-0.65) 4(0.975,-0.65) 5(0.975,0) 6(0.975,0.65)
  rrect14% 1x0.7 on Bottom Paste: 7(0,-0.45) 7(0,0.45)
  rrect10% 1x1.6 smd paste-0.5: 7(0,0)
  silkscreen extent -1.05,-1.2 1.05,1.2, body extent -1.05,-1.05 1.05,1.05, height 0.81
HDR1X2H [mm] "Connector; Header; 2 Position; Right Angle"
  rect 1.5x1.5 hole 0.9: 1(0,0)
  round 1.5 hole 0.9: 2(2.54,0)
  silkscreen extent -1.27,-6.35 3.81,-1.27
HDR1X6 [mm] "Connector; Header; 6 Position"
  rect 1.5x1.5 hole 0.9: 1(0,0)
  round 1.5 hole 0.9: 2(2.54,0) 3(5.08,0) 4(7.62,0) 5(10.16,0) 6(12.7,0)
  silkscreen extent -1.27,-1.27 13.97,1.27
INDC1608X08 [mm] "N, Chip Inductor, 2-Leads, Body 1.60x0.80mm, IPC Medium Density"
  rect 0.85x0.95 smd: 1(-0.675,0) 2(0.675,0)
  body extent -0.87,-0.45 0.87,0.45, height 0.8
LGA-8-30x30x09 [mm] "V, BME680, Combined himidity, pressure, temp and gas sensor"
  rect 0.5x0.5 smd: 1(-1.2,1.2) 2(-0.4,1.2) 3(0.4,1.2) 4(1.2,1.2) 5(1.2,-1.2) 6(0.4,-1.2) 7(-0.4,-1.2) 8(-1.2,-1.2)
  silkscreen extent -1.6,-1.6 1.6,1.91, body extent -1.25,-1.25 1.25,1.25, height 0.93
LITE-ON-LTST-C190GKT-2_V [mm] "Chip, 2-Leads, Body 1.6x0.8mm"
  rect 0.8x0.8 smd: 1(-0.75,0) 2(0.75,0)
  silkscreen extent 1.65,-0.4 1.65,0.4, body extent -0.8,-0.4 0.8,0.4, height 0.8
Losange-1mm [mm]
  rect 1x1 smd rot 45 paste-0.5 mask+0.5: 1(0,0)
LTST-C190KSKT_V [mm] "SMD, 2-Leads, Body 1.6x0.8mm"
  rect 0.8x0.8 smd: 1(-0.75,0) 2(0.75,0)
  silkscreen extent 1.65,-0.4 1.65,0.4, body extent -0.8,-0.4 0.8,0.4, height 0.9
LTST-C190TBKT-2_V [mm] "SMD, 2-Leads, Body 1.6x0.8mm"
  rect 0.8x0.8 smd: 1(-0.75,0) 2(0.75,0)
  silkscreen extent 1.65,-0.4 1.65,0.4, body extent -0.8,-0.4 0.8,0.4, height 0.8
LTST-C191KRKT_V [mm] "SMD, 2-Leads, Body 1.6x0.8mm"
  rect 0.8x0.8 smd: 1(-0.75,0) 2(0.75,0)
  silkscreen extent 1.65,-0.4 1.65,0.4, body extent -0.8,-0.4 0.8,0.4, height 0.9
NEO [mm] "u-blox NEO GNSS module"
  rect 1.8x0.8 smd paste-0.1: 1(5.842,-7) 2(5.842,-5.9) 3(5.842,-4.8) 4(5.842,-3.7) 5(5.842,-2.6) 6(5.842,-1.5) 7(5.842,-0.4) 8(5.842,2.6) 9(5.842,3.7) 10(5.842,4.8) 11(5.842,5.9) 12(5.842,7) 13(-5.842,7) 14(-5.842,5.9) 15(-5.842,4.8) 16(-5.842,3.7) 17(-5.842,2.6) 18(-5.842,-0.4) 19(-5.842,-1.5) 20(-5.842,-2.6) 21(-5.842,-3.7) 22(-5.842,-4.8) 23(-5.842,-5.9) 24(-5.842,-7)
  silkscreen extent -6.11,-8 6.69,8, body extent -6.1,-8 6.1,8, height 2.28
PCBComponent [mm]
  rrect50% 3x0.76 smd: 1(-1.95,2.54)
  rect 3x0.76 smd: 2(1.95,2.54) 3(-1.95,1.27) 4(1.95,1.27) 5(-1.95,0) 6(1.95,0) 7(-1.95,-1.27) 8(1.95,-1.27) 9(-1.95,-2.54) 10(1.95,-2.54)
  silkscreen extent -4.32,2.03 -3.81,3.05, body extent -2.7,-3.13 2.8,3.22, height 4.5
"PMOD SMD Header 6x2" [mm] "Headers & Wire Housings WR-PHD SMT DualSkt 12P 2.54mm Horztl"
  round 0 hole 1.4 unplated: 0(-5.08,3.57) 0(5.08,3.57)
  rect 0.8x2.1 smd: 1(-6.35,-3.57) 3(-3.81,-3.57) 5(-1.27,-3.57) 7(1.27,-3.57) 9(3.81,-3.57) 11(6.35,-3.57)
  rect 0.8x2.5 smd: 2(-6.35,-0.44) 4(-3.81,-0.44) 6(-1.27,-0.44) 8(1.27,-0.44) 10(3.81,-0.44) 12(6.35,-0.44)
  silkscreen extent -8.5,-5.51 8.5,11.5, body extent -7.87,-4.15 7.87,10.54, height 5
QFN50P700X700X80_HS-49M [mm] "QFN, 48-Leads, Body 7.00x7.00mm, Pitch 0.50mm, Thermal Pad 4.00x4.00mm, IPC Low Density"
  oval 0.81x0.28 smd: 1(-3.475,2.75) 2(-3.475,2.25) 3(-3.475,1.75) 4(-3.475,1.25) 5(-3.475,0.75) 6(-3.475,0.25) 7(-3.475,-0.25) 8(-3.475,-0.75) 9(-3.475,-1.25) 10(-3.475,-1.75) 11(-3.475,-2.25) 12(-3.475,-2.75) 25(3.475,-2.75) 26(3.475,-2.25) 27(3.475,-1.75) 28(3.475,-1.25) 29(3.475,-0.75) 30(3.475,-0.25) 31(3.475,0.25) 32(3.475,0.75) 33(3.475,1.25) 34(3.475,1.75) 35(3.475,2.25) 36(3.475,2.75)
  oval 0.28x0.81 smd: 13(-2.75,-3.475) 14(-2.25,-3.475) 15(-1.75,-3.475) 16(-1.25,-3.475) 17(-0.75,-3.475) 18(-0.25,-3.475) 19(0.25,-3.475) 20(0.75,-3.475) 21(1.25,-3.475) 22(1.75,-3.475) 23(2.25,-3.475) 24(2.75,-3.475) 37(2.75,3.475) 38(2.25,3.475) 39(1.75,3.475) 40(1.25,3.475) 41(0.75,3.475) 42(0.25,3.475) 43(-0.25,3.475) 44(-0.75,3.475) 45(-1.25,3.475) 46(-1.75,3.475) 47(-2.25,3.475) 48(-2.75,3.475)
  rect 0.41x0.41 smd: 49(-1.5,1.5) 50(-0.5,1.5) 51(0.5,1.5) 52(1.5,1.5) 53(-1.5,0.5) 54(-0.5,0.5) 55(0.5,0.5) 56(1.5,0.5) 57(-1.5,-0.5) 58(-0.5,-0.5) 59(0.5,-0.5) 60(1.5,-0.5) 61(-1.5,-1.5) 62(-0.5,-1.5) 63(0.5,-1.5) 64(1.5,-1.5)
  silkscreen extent -4.42,-3.65 3.65,3.65, body extent -3.5,-3.5 3.5,3.5, height 0.8
RESC1608X06 [mm] "N, Chip Resistor, 2-Leads, Body 1.60x0.80mm, IPC Medium Density"
  rect 0.8x0.9 smd: 1(-0.675,0) 2(0.675,0)
  body extent -0.87,-0.45 0.87,0.45, height 0.55
SON50P150X75-6M [mm] "SON, 6-Leads, Body 1.50x1.50mm, Pitch 0.50mm, IPC Low Density"
  rect 0.7x0.25 smd: 1(-0.71,0.5) 2(-0.71,0) 3(-0.71,-0.5) 4(0.71,-0.5) 5(0.71,0) 6(0.71,0.5)
  silkscreen extent -1.47,0.79 -1.37,0.89, body extent -0.75,-0.75 0.75,0.75, height 0.75
STM-SOT23-6L_V [mm] "SOT23, 6-Leads, Body 3.05x1.75mm, Pitch 0.95mm"
  rect 1.2x0.6 smd: 1(-1.15,0.95) 2(-1.15,0) 3(-1.15,-0.95) 4(1.15,-0.95) 5(1.15,0) 6(1.15,0.95)
  silkscreen extent -1.27,-1.55 0.15,1.92, body extent -1.6,-1.53 1.6,1.53, height 1.45
TDK-IND0805-125_V [mm] "Chip Inductor, 2-Leads, Body 2.0x1.2mm, Height 1.25mm"
  rect 0.8x1.2 smd: 1(-0.75,0) 2(0.75,0)
  body extent -1.1,-0.7 1.1,0.7, height 1.25
U.FL-R-SMT-1 [mm] "Hirose U.FL connector"
  rect 1x1.05 smd: 1(0,-1.5)
  rect 1.05x2.2 smd: 2(1.475,0) 3(-1.475,0)
  body extent -1.5,-1.55 1.5,1.55, height 1.24
WSON50P200X300X80-11N [mil]
  rect 26x12 smd: 1(-40,39) 2(-40,20) 3(-40,0) 4(-40,-20) 5(-40,-39) 6(40,-39) 7(40,-20) 8(40,0) 9(40,20) 10(40,39)
  rect 33x94 smd: 11(0,0)
  silkscreen extent -63,-61 41,63, body extent -39,-59 39,59, height 31

## Part data
B1 B2 B3 B4 B5 B6: library part PUSH_BUTTON, Supplier 1=Mouser, Supplier Part Number 1=653-B3U-1000P
C1 C2 C3 C4 C5 C6 C7 C8 C9 C10 C20 C21 C22 C23 C24 C30 C31 C32 C33 C34 C37 C38 C39 C40 C41 C42 C43: library part CMP-001-0010-A.3, "MLCC Capacitor 1608", AccessRights=2147483647, ComponentType=Capacitor, ContentType=Component, ContentTypeGUID=CB3C11C4-E317-11DF-B822-12313F0024A2, Folder=LSN\Components\Passifs\Condensateurs\, FolderGUID=9DA6C5B0-B134-4C0D-99DA-A840DED25FBD, ItemGUID=6B05C9AF-D3C2-4723-98C2-0E51694C471A, ItemHRID=CMP-001-0010, LifeCycle="New From Design", LifeCycleStateGUID=706004B5-C76E-482E-903B-BA0E4FAE086A, ReleaseDate="31/10/2016 02:21:03 PM", RevisionId=A.2
C11 C12 C13 C14 C15 C16 C17 C18 C19 C25 C26 C27 C28 C29: library part CMP-001-0010-A.1, "MLCC Capacitor 1608"
C35 C36: library part CMP-001-0010-A.3, "MLCC Capacitor 1608", Supplier Part Number 1=77-VJ0603D0R7VXPAJ, AccessRights=2147483647, ComponentType=Capacitor, ContentType=Component, ContentTypeGUID=CB3C11C4-E317-11DF-B822-12313F0024A2, Folder=LSN\Components\Passifs\Condensateurs\, FolderGUID=9DA6C5B0-B134-4C0D-99DA-A840DED25FBD, ItemGUID=6B05C9AF-D3C2-4723-98C2-0E51694C471A, ItemHRID=CMP-001-0010, LifeCycle="New From Design", LifeCycleStateGUID=706004B5-C76E-482E-903B-BA0E4FAE086A, ReleaseDate="31/10/2016 02:21:03 PM", RevisionId=A.2, Supplier 1=Mouser
C44 C45: library part CMP-001-0011-A.3, "MLCC Capacitor 2012", AccessRights=2147483647, ComponentType=Capacitor, ContentType=Component, ContentTypeGUID=CB3C11C4-E317-11DF-B822-12313F0024A2, Folder=LSN\Components\Passifs\Condensateurs\, FolderGUID=9DA6C5B0-B134-4C0D-99DA-A840DED25FBD, ItemGUID=A3557974-B927-469A-A63C-1E583F58844C, ItemHRID=CMP-001-0011, LifeCycle="New From Design", LifeCycleStateGUID=706004B5-C76E-482E-903B-BA0E4FAE086A, ReleaseDate="31/10/2016 02:37:45 PM", RevisionId=A.2
C46: library part CMP-001-0010-A.3, "MLCC Capacitor 1608", Supplier Part Number 1=77-VJ0603D100FXPAJ, AccessRights=2147483647, ComponentType=Capacitor, ContentType=Component, ContentTypeGUID=CB3C11C4-E317-11DF-B822-12313F0024A2, Folder=LSN\Components\Passifs\Condensateurs\, FolderGUID=9DA6C5B0-B134-4C0D-99DA-A840DED25FBD, ItemGUID=6B05C9AF-D3C2-4723-98C2-0E51694C471A, ItemHRID=CMP-001-0010, LifeCycle="New From Design", LifeCycleStateGUID=706004B5-C76E-482E-903B-BA0E4FAE086A, ReleaseDate="31/10/2016 02:21:03 PM", RevisionId=A.2, Supplier 1=Mouser
D1: library part CMP-2000-05378-1, "Very low capacitance ESD protection, 3.5 pF, -40 to 125 degC, 6-Pin SOT23, RoHS, Tape and Reel", Capacitance Value=3.5pF, Clamping Voltage=17V, Leakage Current=0.15uA, Manufacturer=STMicroelectronics, Operating Temperature Classification=Automotive, Operating Temperature Max Deg. C=125C, Operating Temperature Min Deg. C=-40C, Operating Temp Range=-40Cto125C, Package / Case=SOT-23, Package Description="6-Pin Small Outline Transistor, Body 2.925 x 1.625 mm, Pitch 0.95 mm", Package Reference=SOT23-6L, Peak Pulse Current=5A, Reverse Breakdown Voltage=6V, Reverse Stand-off Voltage=5V, Test Current (It)=1mA, Clamping Voltage (Max)=17V, Configuration=Dual, Datasheet URL=http://www.st.com/st-web-ui/static/active/en/resource/technical/document/datasheet/CD00050750.pdf, Datasheet Version="Rev. 5, 10/2011", Direction Type=Uni-Directional, Leakage Current (Max)=0.15uA, Manufacturer URL=http://www.st.com/, Mounting=SurfaceMount, Mounting Style=SurfaceMount, Number of Elements=1, Packaging=TapeandReel, Pin Count=6, Polarity=Uni-Directional, Product Depth (mm)=1.75mm, Product Height (mm)=1.3mm, Product Length (mm)=3.05mm, Rad Hardened=No, Suppressor Type=DiodeArrays, Working Voltage=5V, Working Voltage (Max)=5V
D2 D3: library part CMP-001-0034-A.1, "General-Purpose Rectifier, Vrrm = 50V"
DS1 DS5: library part CMP-00027-A.1, "LED Uni-Color Red, 62.5 mW, 5 V, -30 to 85 degC, 2-Pin SMD, RoHS, Tape and Reel", Capacitance="100 uF", Case\Package=Radial, Max Operating Temperature="85 degC", Min Operating Temperature="-40 degC", Package Quantity=200, Tolerance=20%, Voltage Rating="50 V", ComponentLink1Description="Manufacturer URL", ComponentLink1URL=http://www.us.liteon.com/, ComponentLink2Description=Datasheet, ComponentLink2URL=http://optoelectronics.liteon.com/upload/download/DS-22-99-0151/S_110_LTST-C190KRKT.pdf, DatasheetVersion="Rev. F, 05/2013", Diameter="8 mm", Height="11.5 mm", Lead Pitch="3.5 mm", Length="11.5 mm", Mount="Through Hole", PackageDescription="2-Pin Surface Mount Device, Body 1.6 x 0.8 mm", PackageReference=C191KRKT, Packaging=Bulk, Pins=2, Radiation Hardening=No, REACH SVHC="No SVHC", RoHSCompliant=true, Voltage Rating (DC)="50 V"
DS2 DS6 DS9 DS10: library part CMP-00026-A.1, "LED Uni-Color Green, 75 mW, 5 V, -30 to 85 degC, 2-Pin SMD, RoHS, Tape and Reel", Emitting Color=YellowGreen, Forward Current=30mA, Forward Voltage=2.4V, Manufacturer=Lite-On, Operating Temperature Classification=Industrial, Operating Temp Range=-55Cto85C, Package Description="2-Pin Surface Mount Device, Body 1.6 x 0.8 mm", Package Reference=C190KGKT, Package Type=ChipLed, Power Dissipation=75W, Reverse Voltage=5V, Test Current (It)=20mA, Chip Material=AlGaInP, Datasheet URL=http://datasheet.octopart.com/LTST-C190KGKT-Lite-On-datasheet-43775815.pdf, Datasheet Version=Jul-15, DELETED=Compliant, Dominant Wave Length=571nm, High Brightness=Yes, Lens Dimensions=1.1X0.8X0.52mm, Luminous Intensity=35mcd, Lum Intensity=35mcd, Main Category=ChipLED, Manufacturer URL=http://www.us.liteon.com/, Mounting=SurfaceMount, Number of Elements=1, Packaging=TapeandReel, Peak Wavelength=574nm, Pin Count=2, Product Depth (mm)=0.8mm, Product Height (mm)=0.8mm, Product Length (mm)=1.6mm, Rad Hardened=No, Shape Type=Rectangular, Type=Uni-Color, Viewing Angle=130deg
DS3 DS7: library part CMP-00021-A.1, "Single Color Chip LED, 2.8 to 3.8 V, 28 to 180 mcd, -20 to 80 degC, 2-Pin SMD, RoHS, Tape and Reel", Case\Package=DFN, Max Operating Temperature="125 degC", Max Supply Voltage="3.6 V", Min Operating Temperature="-40 degC", Min Supply Voltage="2.1 V", Nominal Supply Voltage="3 V", ComponentLink1Description="Manufacturer URL", ComponentLink1URL=http://www.us.liteon.com/, ComponentLink2Description=Datasheet, ComponentLink2URL=http://optoelectronics.liteon.com/upload/download/DS-22-99-0224/S_110_LTST-C190TBKT(0630).pdf, DatasheetVersion="Rev. K, 08/2011", Height="1.1 mm", Interface=Serial, Length="3 mm", Mount="Surface Mount", PackageDescription="2-Pin Surface Mount Device, Body 1.6 x 0.8 mm", PackageReference=C190TBKT-2, Packaging="Cut Tape", Pins=6, REACH SVHC="No SVHC", RoHSCompliant=true, Width="3 mm"
DS4 DS8: library part CMP-00025-A.1, "LED Uni-Color Yellow, 75 mW, 30 mA, -30 to 85 degC, 2-Pin SMD, RoHS, Tape and Reel", Case\Package=0603, Case Code (Metric)=1608, Max Operating Temperature="155 degC", Min Operating Temperature="-55 degC", Package Quantity=5000, Power Rating="100 mW", Resistance="12 kohm", Tolerance=1%, Voltage Rating="50 V", Case Code (Imperial)=0603, ComponentLink1Description="Manufacturer URL", ComponentLink1URL=http://www.us.liteon.com/, ComponentLink2Description=Datasheet, ComponentLink2URL=http://optoelectronics.liteon.com/upload/download/DS-22-99-0189/S_110_LTST-C190KSKT.pdf, DatasheetVersion="Rev. I, 10/2012", Height="0.45 mm", Length="1.6 mm", Mount="Surface Mount", PackageDescription="2-Pin Surface Mount Device, Body 1.6 x 0.8 mm", PackageReference=C190KSKT, Packaging="Tape and Reel", Pins=2, REACH SVHC="No SVHC", RoHSCompliant=true, Voltage Rating (DC)="50 V", Width="0.8 mm"
E1: library part CMP-00015-A.1, "1/4-wave Monopole Ultra-Compact Chip Antenna, CHP Series, 868MHz, Tape and Reel", DatasheetVersion=Jan-2009, Note1="No ground planes or traces under the antenna", Note2="Pin 1 is feed terminal, Pin 2 is for physical support only.", PackageDescription="SMD Ceramic Antenna, CHP Series, 868/916MHz, 2-Leads, 16.0 x 3.0 x 1.7 mm Body", PackageReference=ANT-868-916-CHP, PackageVersion=Jan-2009, PCB_Layout="Complies with manufacturer's recommendation."
E2: library part CMP-001-0103-A.2, "Antennas 2.45GHz ANTENNA HIGH GAIN (VERT)"
J1 J2 J3: library part CMP-001-0013-A.3, "Hirose U.FL SMT connector", Supplier Part Number 1=798-U.FL-R-SMT-110, Datasheet=https://www.hirose.com/product/en/download_file/key_name/U.FL/category/Catalog/doc_file_id/31697/?file_category_id=4&item_id=15&is_series=1, Drawing=https://www.hirose.com/product/en/download_file/key_name/U.FL-R-SMT-1%2810%29/category/Drawing%20(2D)/doc_file_id/37627/?file_category_id=6&item_id=03310472210&is_series=, Supplier 1=Mouser
J4: library part CMP-001-0075-A.1, Supplier Part Number 1=649-10118194-0001LF, Supplier 1=Mouser
L1: library part CMP-001-0101-A.4, "Ferrite Beads 1608", Supplier Part Number 1=81-LQW18AN9N1C80D, AccessRights=2147483647, ContentType=Component, ContentTypeGUID=CB3C11C4-E317-11DF-B822-12313F0024A2, Folder=LSN\Components\Passifs\Inductances\, FolderGUID=CF708A04-0EC7-4EEE-8F3D-D187CFC5366D, ItemGUID=17F6FBB7-027A-4BA7-9144-FCD7399F32FE, ItemHRID=CMP-001-0101, LifeCycle="New From Design", LifeCycleStateGUID=706004B5-C76E-482E-903B-BA0E4FAE086A, ReleaseDate="31/07/2017 06:40:06 PM", RevisionId=A.3, Supplier 1=Mouser
L2 L3 L5 L6: library part CMP-001-0101-A.4, "Ferrite Beads 1608", AccessRights=2147483647, ContentType=Component, ContentTypeGUID=CB3C11C4-E317-11DF-B822-12313F0024A2, Folder=LSN\Components\Passifs\Inductances\, FolderGUID=CF708A04-0EC7-4EEE-8F3D-D187CFC5366D, ItemGUID=17F6FBB7-027A-4BA7-9144-FCD7399F32FE, ItemHRID=CMP-001-0101, LifeCycle="New From Design", LifeCycleStateGUID=706004B5-C76E-482E-903B-BA0E4FAE086A, ReleaseDate="31/07/2017 06:40:06 PM", RevisionId=A.3
L4: library part CMP-001-0101-A.4, "Ferrite Beads 1608", Supplier Part Number 1=994-0603HP-5N1XGLU, AccessRights=2147483647, ContentType=Component, ContentTypeGUID=CB3C11C4-E317-11DF-B822-12313F0024A2, Folder=LSN\Components\Passifs\Inductances\, FolderGUID=CF708A04-0EC7-4EEE-8F3D-D187CFC5366D, ItemGUID=17F6FBB7-027A-4BA7-9144-FCD7399F32FE, ItemHRID=CMP-001-0101, LifeCycle="New From Design", LifeCycleStateGUID=706004B5-C76E-482E-903B-BA0E4FAE086A, ReleaseDate="31/07/2017 06:40:06 PM", RevisionId=A.3, Supplier 1=Mouser
L7: library part CMP-0266-00001-1, "Multilayer Inductor, 2.2 uH, ±20%, 300 mOhm, 50MHz, 0805(2012)", DC Resistance="0.3 Ohm", PartNumber=MLZ2012N100LT, Supplier Part Number 1=810-MLZ2012N2R2LT000, ComponentLink1Description="Manufacturer URL", ComponentLink1URL=http://www.global.tdk.com/, ComponentLink2Description=Datasheet, ComponentLink2URL=http://www.tdk.co.jp/tcfx01/c533_mlz.pdf, DatasheetVersion=05/2013, Mounting Technology="Suface Mount", PackageDescription="2-Pin SMT Inductor, 2 x 1.25 mm Body", PackageReference=IND0805-125, Supplier 1=Mouser
M1 M2 M3 M4 M5 M6: library part CMP-001-0056-A.1, "Losange 1mm"
P1: "Header, 6-Pin", LatestRevisionDate=17-Jul-2002, LatestRevisionNote="Re-released for DXP Platform.", Publisher="Altium Limited"
P2: library part CMP-001-0019-A.2, "Minitek127®  :  1.27x1.27MM BTB, HEADER UNSHROUDED, SMT, 10 POSITIONS"
P3 P4: library part CMP-001-0115-A.1, "Header, 6-Pin, Dual row"
P5 P6: "Header, 2-Pin, Right Angle", LatestRevisionDate=17-Jul-2002, LatestRevisionNote="Re-released for DXP Platform.", Publisher="Altium Limited"
R1 R2 R3 R4 R5 R6 R7 R8 R9 R10 R11 R12 R13 R14 R15 R16 R17 R18 R19 R20 R21 R22 R23 R24 R25 R26 R27 R28 R29 R30 R31 R32 R33 R34 R35 R36 R37 R38 R39: library part CMP-001-0005-A.4, "1608 resistor"
TP1 TP2 TP3 TP4 TP5 TP6 TP7 TP8 TP9 TP10 TP11 TP12 TP13 TP14 TP15 TP16 TP17 TP18 TP19 TP20 TP21 TP22: library part CMP-001-0108-A.3, "Circuit Board Hardware - PCB MINI SMT TEST POINT"
U1: library part CMP-001-0107-A.4, "Combined himidity, pressure, temp and gas sensor"
U2: library part CMP-00007-A.1, "Intelligent 9-Axis Absolute Orientation Sensor, 1.7 V to 3.6 V, -40 to 85 degC, 28-Pin LGA, RoHS, Tape and Reel", Manufacturer="Bosch Sensortec", Supplier Part Number 1=262-BNO055, Datasheet URL=http://datasheet.octopart.com/BNO055-Bosch-datasheet-45840915.pdf, Datasheet Version="Rev. 1.3, 08/2015", Manufacturer URL=http://www.bosch-sensortec.com, Supplier 1=Mouser
U3: library part CMP-001-0105-A.1, "u-blox M8 concurrent GNSS LCC module, TCXO, ROM, SAW, LNA"
U4: library part CMP-001-0102-A.1, "RF Modules Type ABZ LoRa Module MCU - STM32L082"
U5: library part CMP-001-0100-A.1, "2.4 GHz Bluetooth Low Energy ver. 4.2 compliant, Up to 48 MHz ARM® Cortex-M0+ core, On-chip 512/256 KB Flash memory, On-chip 128/64 KB SRAM"
U6: library part CMP-001-0114-A.2
U7: library part CMP-001-0111-A.1, "800-mA, Single-Input, Single-Cell Li-Ion Battery Solar Charger"
U8: library part CMP-00017-A.1, "Buck Step Down Regulator with 2.3 to 6 V Input and 3.3 V Output, -40 to 85 degC, 6-Pin SON (DRV), Green (RoHS & no Sb/Br)", Manufacturer="Texas Instruments", Rating=Catalog, Switch Current Limit(Typ)(A)=1.4, ComponentLink1Description=Datasheet, ComponentLink1URL=http://www.ti.com/general/docs/lit/getliterature.tsp?genericPartNumber=TPS62291&fileType=pdf, ComponentLink2Description="Package Specification", ComponentLink2URL=http://www.ti.com/litv/pdf/mpds216d, ComponentLink3Description="URL Link1", ComponentLink3URL="Samples URL:http://www.ti.com/product/tps62291#samples", DatasheetVersion=SLVS764C, Duty Cycle(Max)(%)=100, Eco-Plan="Green (RoHS & no Sb/Br)", Iout(Max)(A)=1, Iq(Typ)(mA)=0.015, Mounting Technology="Surface Mount", PackageDescription="6-Pin Plastic Small Outline No-Lead, 2 x 2 x 0.8 mm Body, 0.65 mm Pitch, Exposed Pad", PackageReference=DRV0006A, PackageVersion="revE, Oct-2010", PartNumber=TPS62291DRVT, Preset Vout(V)=3.3, Regulated Outputs(#)=1, SubFamily="Step-Down Regulator", Synchronous Rectification=TRUE, Topology=Buck, Vin(Max)(V)=6, Vin(Min)(V)=2.3, Vout(Max)(V)=3.3, Vout(Min)(V)=3.3
X1: library part CMP-0449-00001-2, "Crystal, 32 MHz, 8 pF, -10 to 70 degC, Surface Mount 2.5 x 2.0 mm", Frequency Range="32000 kHz", Load Capacitance="8 pF", Manufacturer=Kyocera, Motional Series Resistance="50 ohm (max)", Operating Temperature="-10 to 70 degC", ComponentLink1Description="Manufacturer URL", ComponentLink1URL=http://global.kyocera.com/, ComponentLink2Description=Datasheet, ComponentLink2URL=http://global.kyocera.com/prdct/electro/pdf/xtal/cx2520db_cs_e.pdf, ComponentLink3Description="Package Specification", ComponentLink3URL=http://global.kyocera.com/prdct/electro/pdf/xtal/cx2520db_cs_e.pdf, Drive Level="10uW (100uW max.)", Mounting Technology="Surface Mount", PackageDescription="4-Pin Hand Drawn，Body 2.5x2mm", PackageReference=CX2520DB32000D0GEJZ1-4, Packing="Tape and Reel", PartNumber=CX2520DB32000D0GEJZ1
X2: library part CMP-0447-00001-2, "Crystal, 32.768 kHz, 12.5 pF, -40 to 85 degC, SMD Low Profile 3.2 x 1.5 x 0.9 mm, Tape and Reel", Equivalent Series Resistance (R1)="70 Kohm", Frequency="32.768 kHz", Frequency Tolerance @+25degC="+/- 20 ppm", Insulation Resistance (Min)="500 Mohm", Load Capacitance (CL)="12.5 pF", Manufacturer=Abracon, Operating Temperature="-40 to 85 degC", Q Value (Type)=30000, Shunt Capacitance (C0)="0.9 to 1.2 pF", Supplier Part Number 1=815-ABS07-32.768KHZT, ComponentLink1Description="Manufacturer URL", ComponentLink1URL=http://www.abracon.com/, ComponentLink2Description=Datasheet, ComponentLink2URL=http://www.abracon.com/Resonators/ABS07.pdf, ComponentLink3Description="Package Specification", ComponentLink3URL=http://www.abracon.com/Resonators/ABS07.pdf, DatasheetVersion=04.03.13, Drive Level (Type)="0.1 uW", Mounting Technology="Surface Mount", Operation Mode="Flexural Mode (Tuning Fork)", PackageDescription="2-Pin Hand Drawn, Body 3.2x1.5mm, Pitch 2.5mm", PackageReference=ABS07-2, Packing="Tape and Reel", PartNumber=ABS07-32.768KHz-T, Supplier 1=Mouser

## Free pads (board coordinates)
  oval 0.7x0.23 hole 3.2 unplated: T(3,66) T(27,24) T(65,3) T(65,77)

## Via types
v1: diameter 0.6, hole 0.25, Component Side to Solder Side, tented both sides, 138 vias
v2: diameter 0.8, hole 0.35, Component Side to Solder Side, tented both sides, 67 vias
v3: diameter 0.8, hole 0.25, Component Side to Solder Side, tented both sides, 4 vias
v4: diameter 0.5, hole 0.2, Component Side to Solder Side, 2 vias
v5: diameter 1.27, hole 0.711, Component Side to Solder Side, tented both sides, 1 vias
v6: diameter 1, hole 0.5, Component Side to Solder Side, tented both sides, 1 vias

## Nets (pads, with @x,y where several pads share a name; then routed paths per layer and width w, separated by ;. In a path a pad name is that pad's centre, name@x,y a point inside that pad or via, vN(x,y) a via of type N, cw(c..) or ccw(c..) an arc to the next point about the centre after c; other vN are vias at no path point)
ANT: C20.2 C22.1 L1.1 U4.26 | length 4.8
  Component Side w0.548: L1.1@26.775,19.1 26.875,19 U4.26@31.55,19
ANT_MKW41Z: C35.2 C37.1 L4.1 U5.33 | length 4.3
  Component Side w0.53: 21.75,61.3 C35.2@21.75,62.775 C37.1@21.75,64.225 L4.1@21.75,65.575
BAT_LEVEL: C40.2 R31.1 R32.2 U5.23 | length 26.5
  Component Side w0.2: U5.23@26.475,59.25 26.8,59.25 26.975,59.425 27.9,59.425 30,57.325 30,56.05 v1(31.275,54.775)
  Solder Side w0.2: C40.2@20.25,47.75 20.25,51.875 21.4,53.025 29.09,53.025 30.84,54.775 v1(31.275,54.775)
  Solder Side w0.5: R31.1@20.25,45.15 R32.2@20.25,46.45 C40.2@20.25,47.75
BOOT0: R20.1 R21.1 U4.43 | length 2.8
  Component Side w0.2: R20.1@37.6,8.675 U4.43@37.6,10.2 ; R20.1@37.775,8.5 R21.1@39.025,8.5
EN_REG: R39.1 U6.3 U8.4 | length 4.8
  Solder Side w0.15: R39.1@16.425,42.6 17.1,43.275 17.1,45.385 U6.3@16.935,45.55
  Solder Side w0.2: U8.4@15.1,42.97 U8.4@15.1,42.9 16.125,42.9 R39.1@16.425,42.6
EXTAL: C31.2 U5.30 X1.1 | length 5.9
  Component Side w0.2: U5.30@23.25,60.475 23.25,60.95 23.95,61.65 25.454,61.65 26,62.196 26,62.35 X1.1@26.15,62.5 26.525,62.5 C31.2@27.5,63.475